# Altium PCB OBC_v8.PcbDoc (part 1 of 3)
Units mil, origin at the board's own origin, x right, y up, seen from the top; angles counter-clockwise.
Board outline 3550 x 3775 mil, 6 copper layers (Top Layer, MidLayer1, GND, Power, MidLayer2, Bottom Layer); 109 components, 228 nets, 761 pads, 521 vias.
Unrouted connection lines stored in the file: 4.
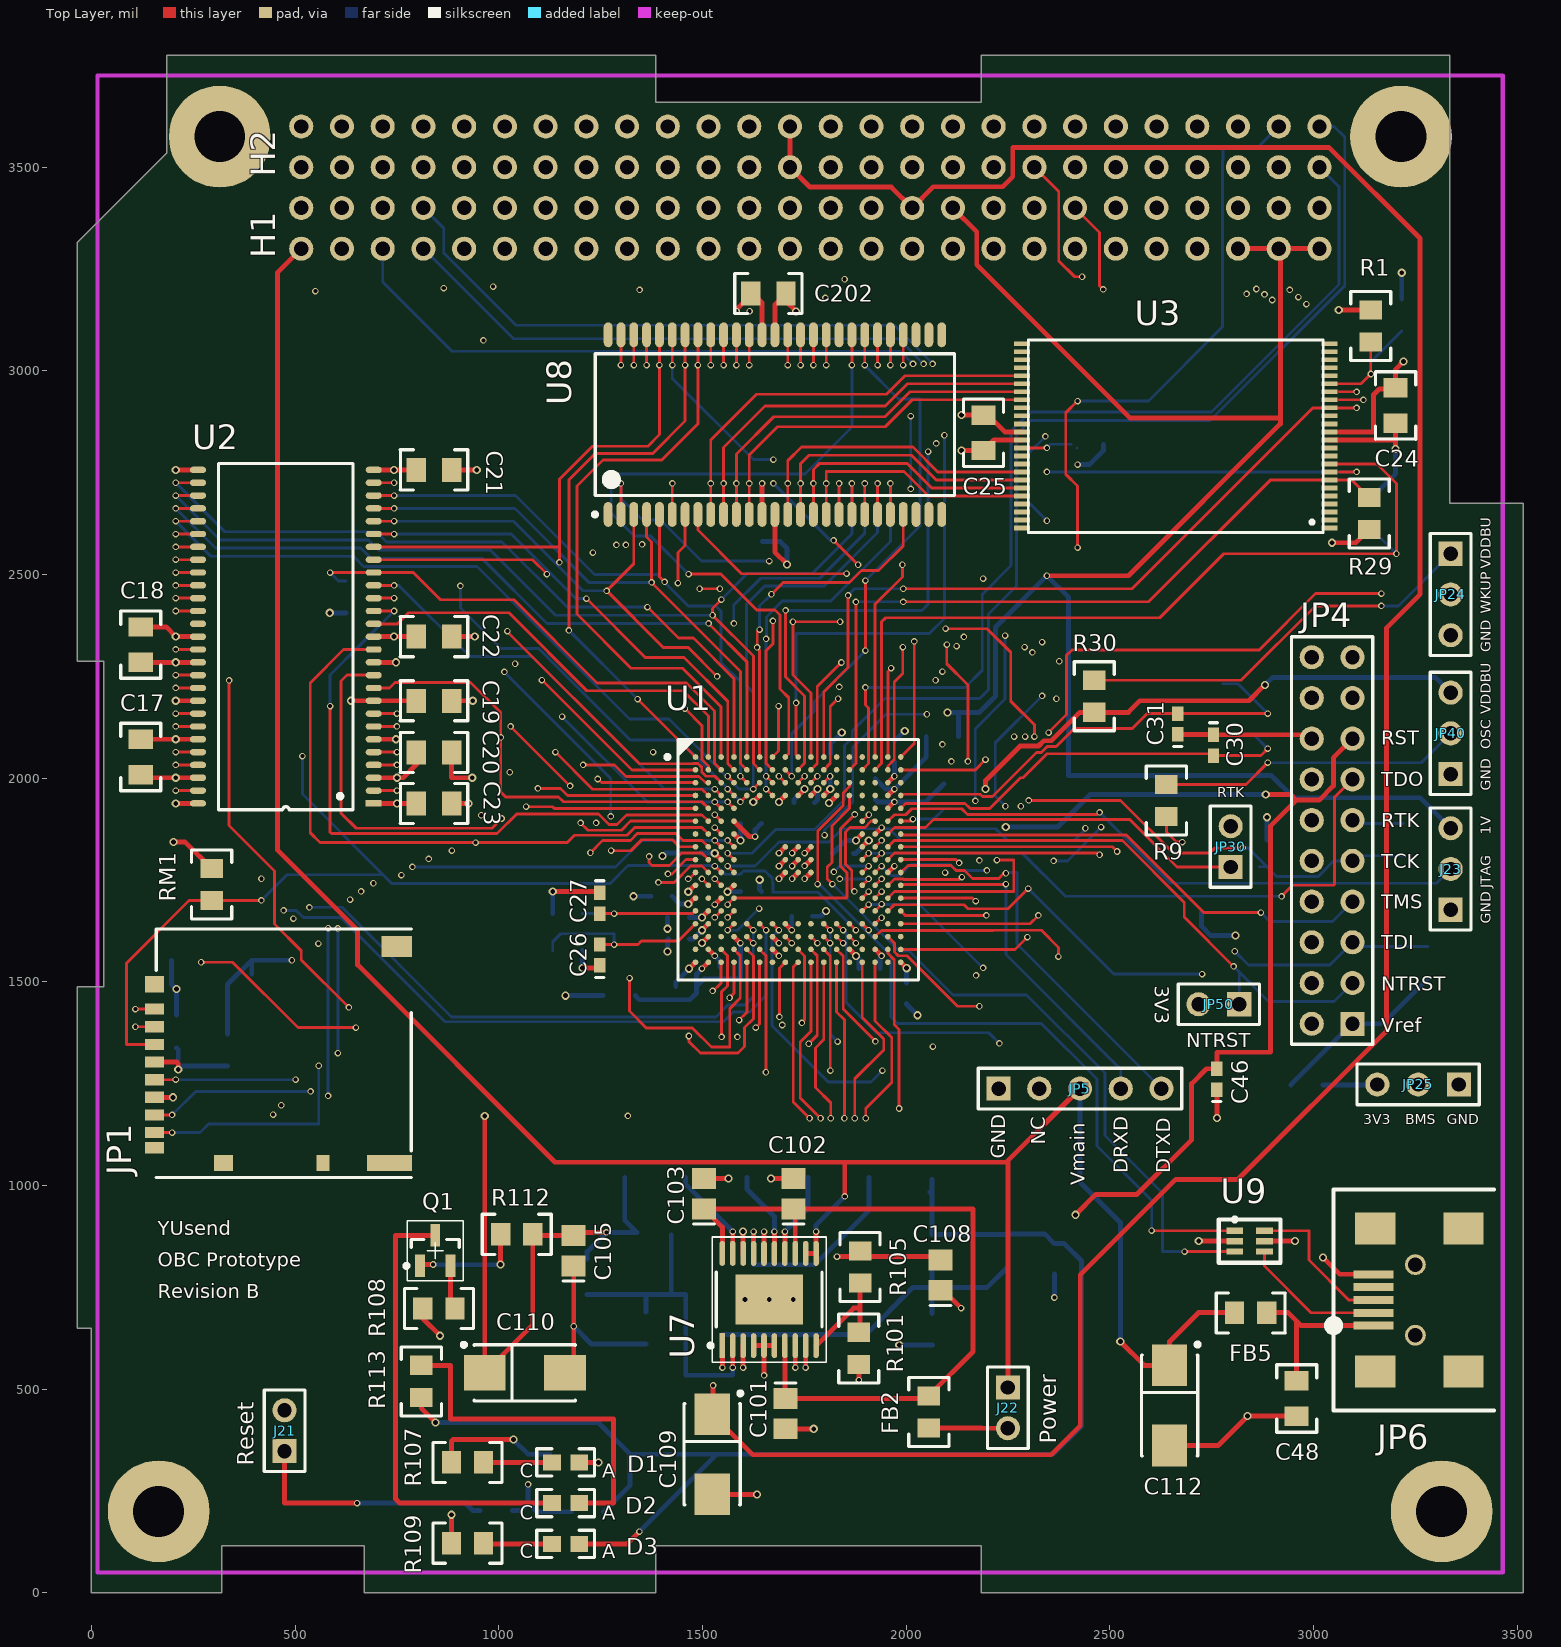
[diagram p0: Top Layer view]
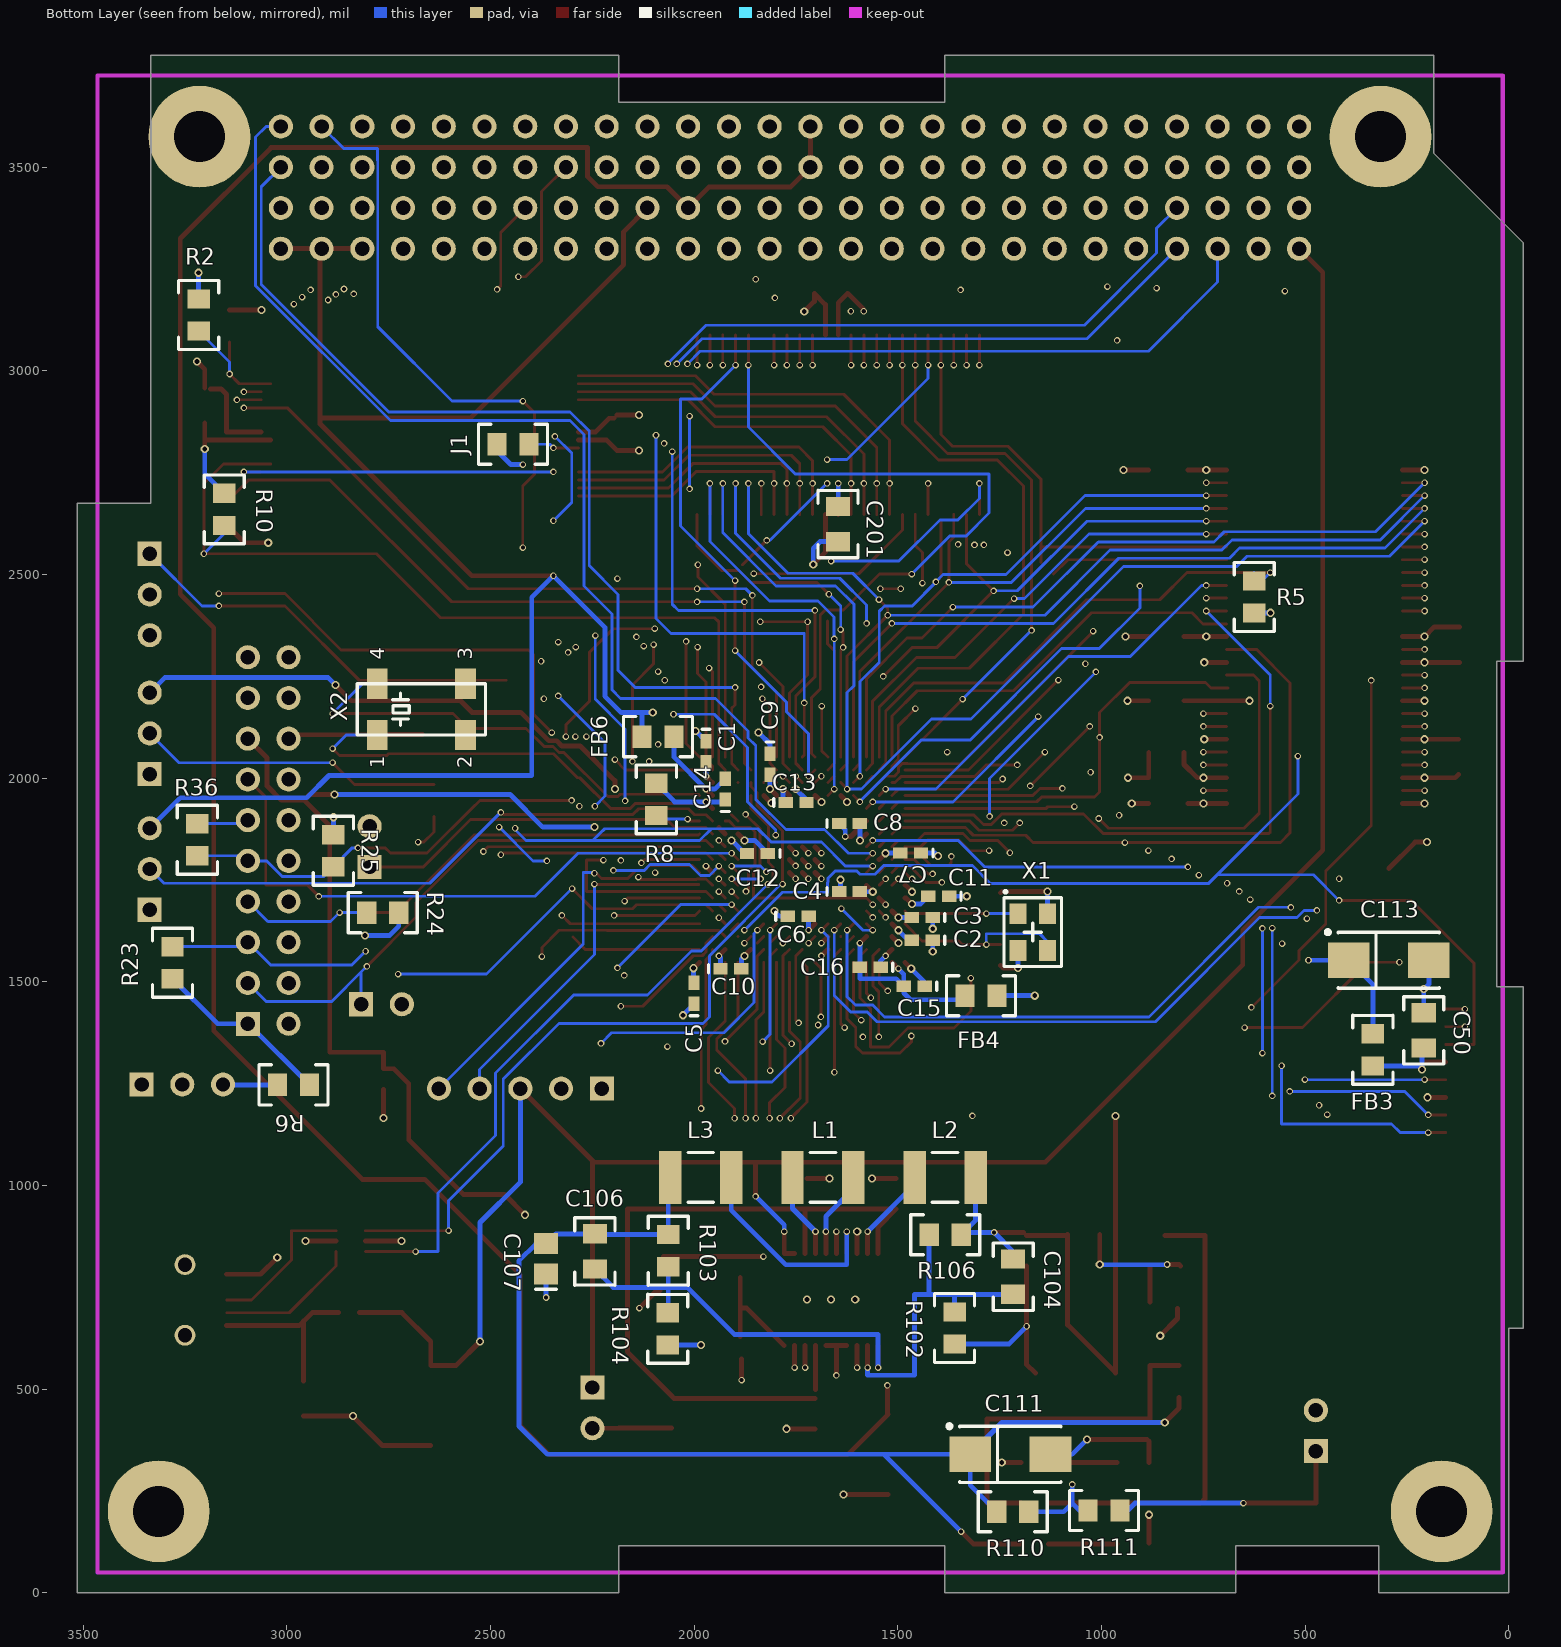
[diagram p1: Bottom Layer view, seen from below]
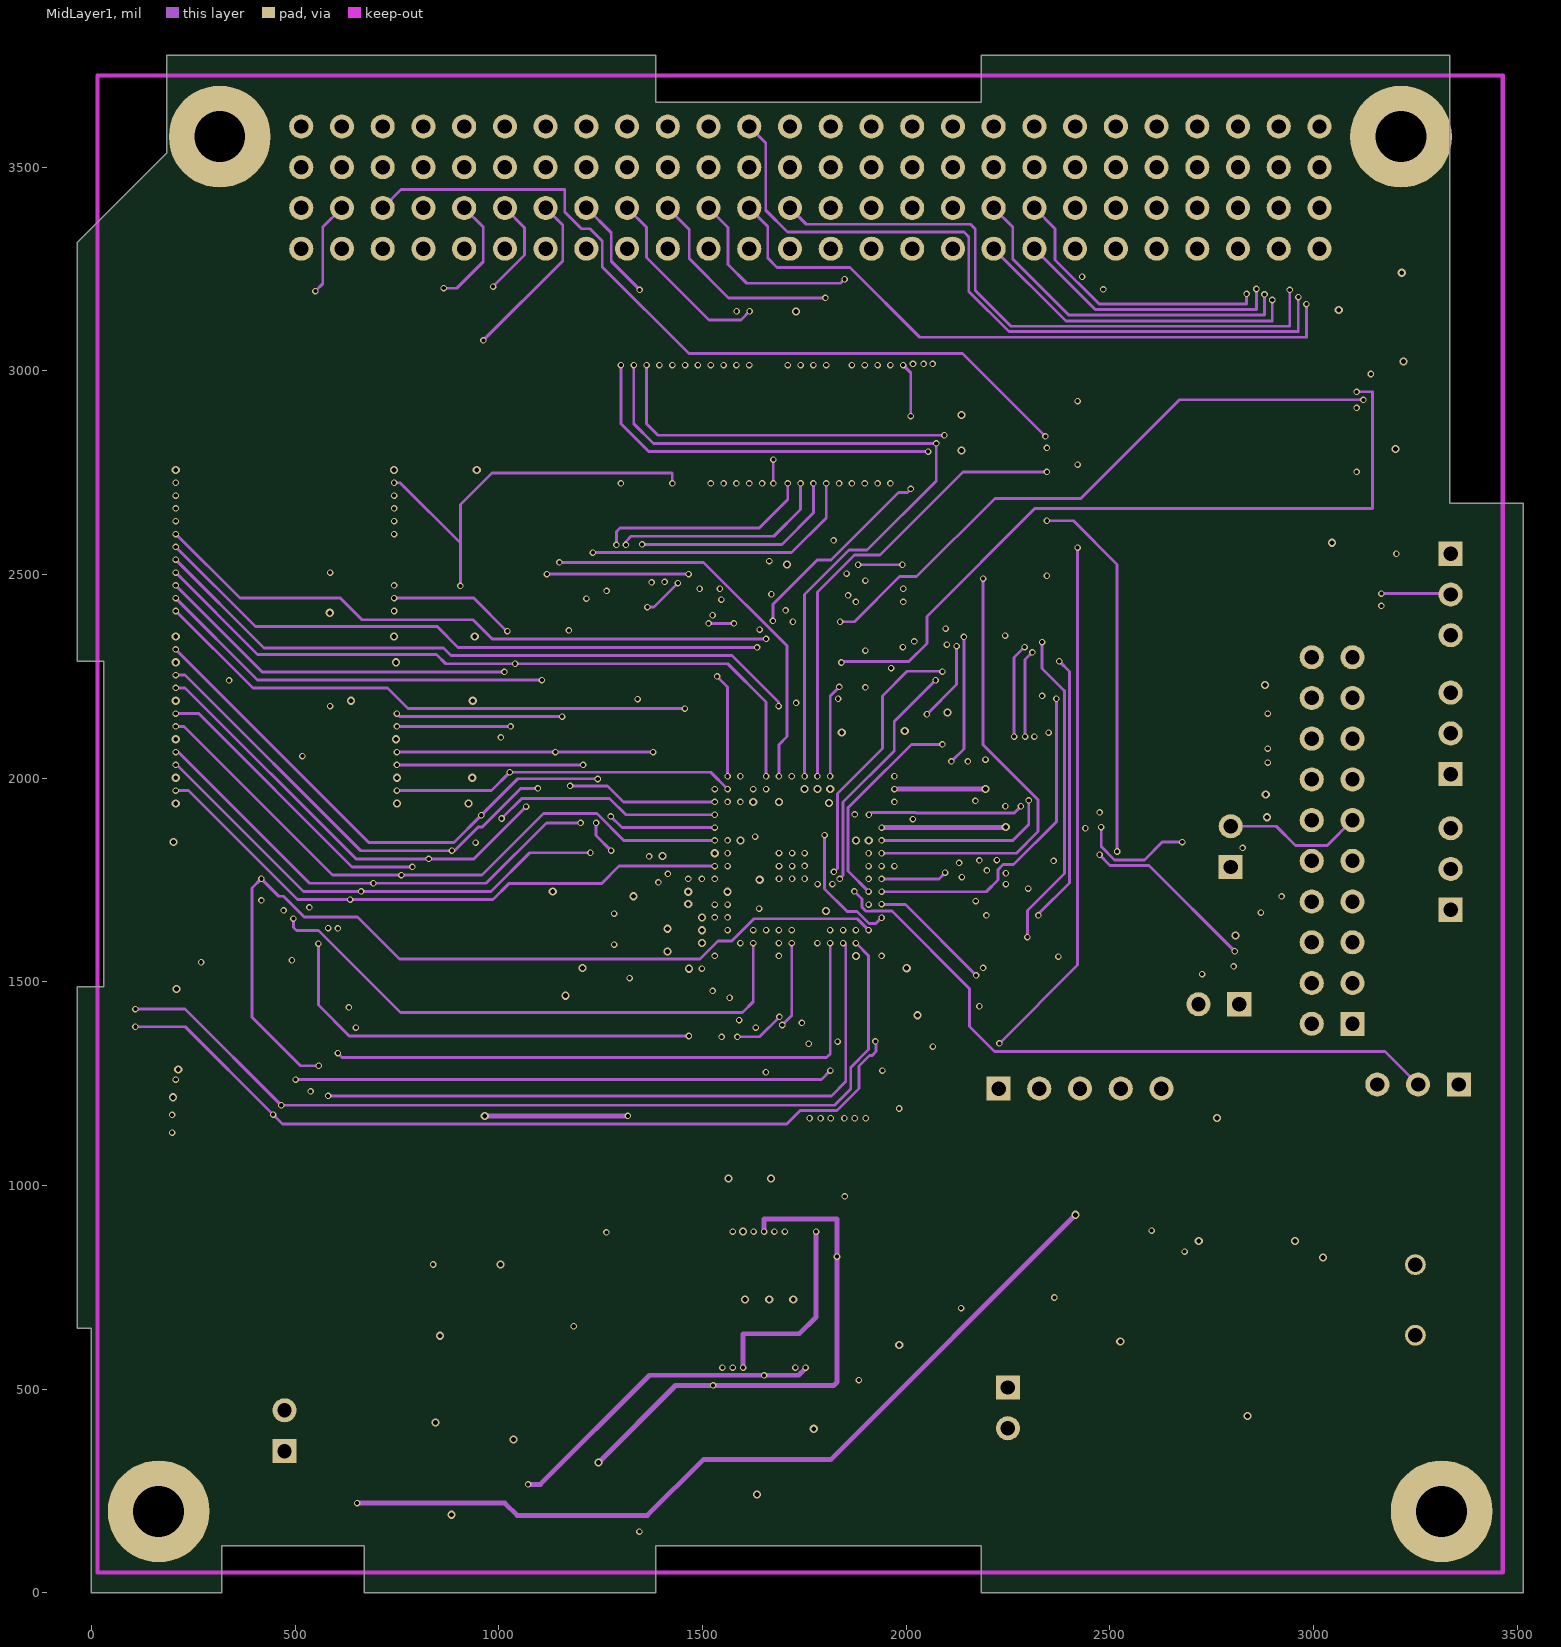
[diagram p2: MidLayer1]
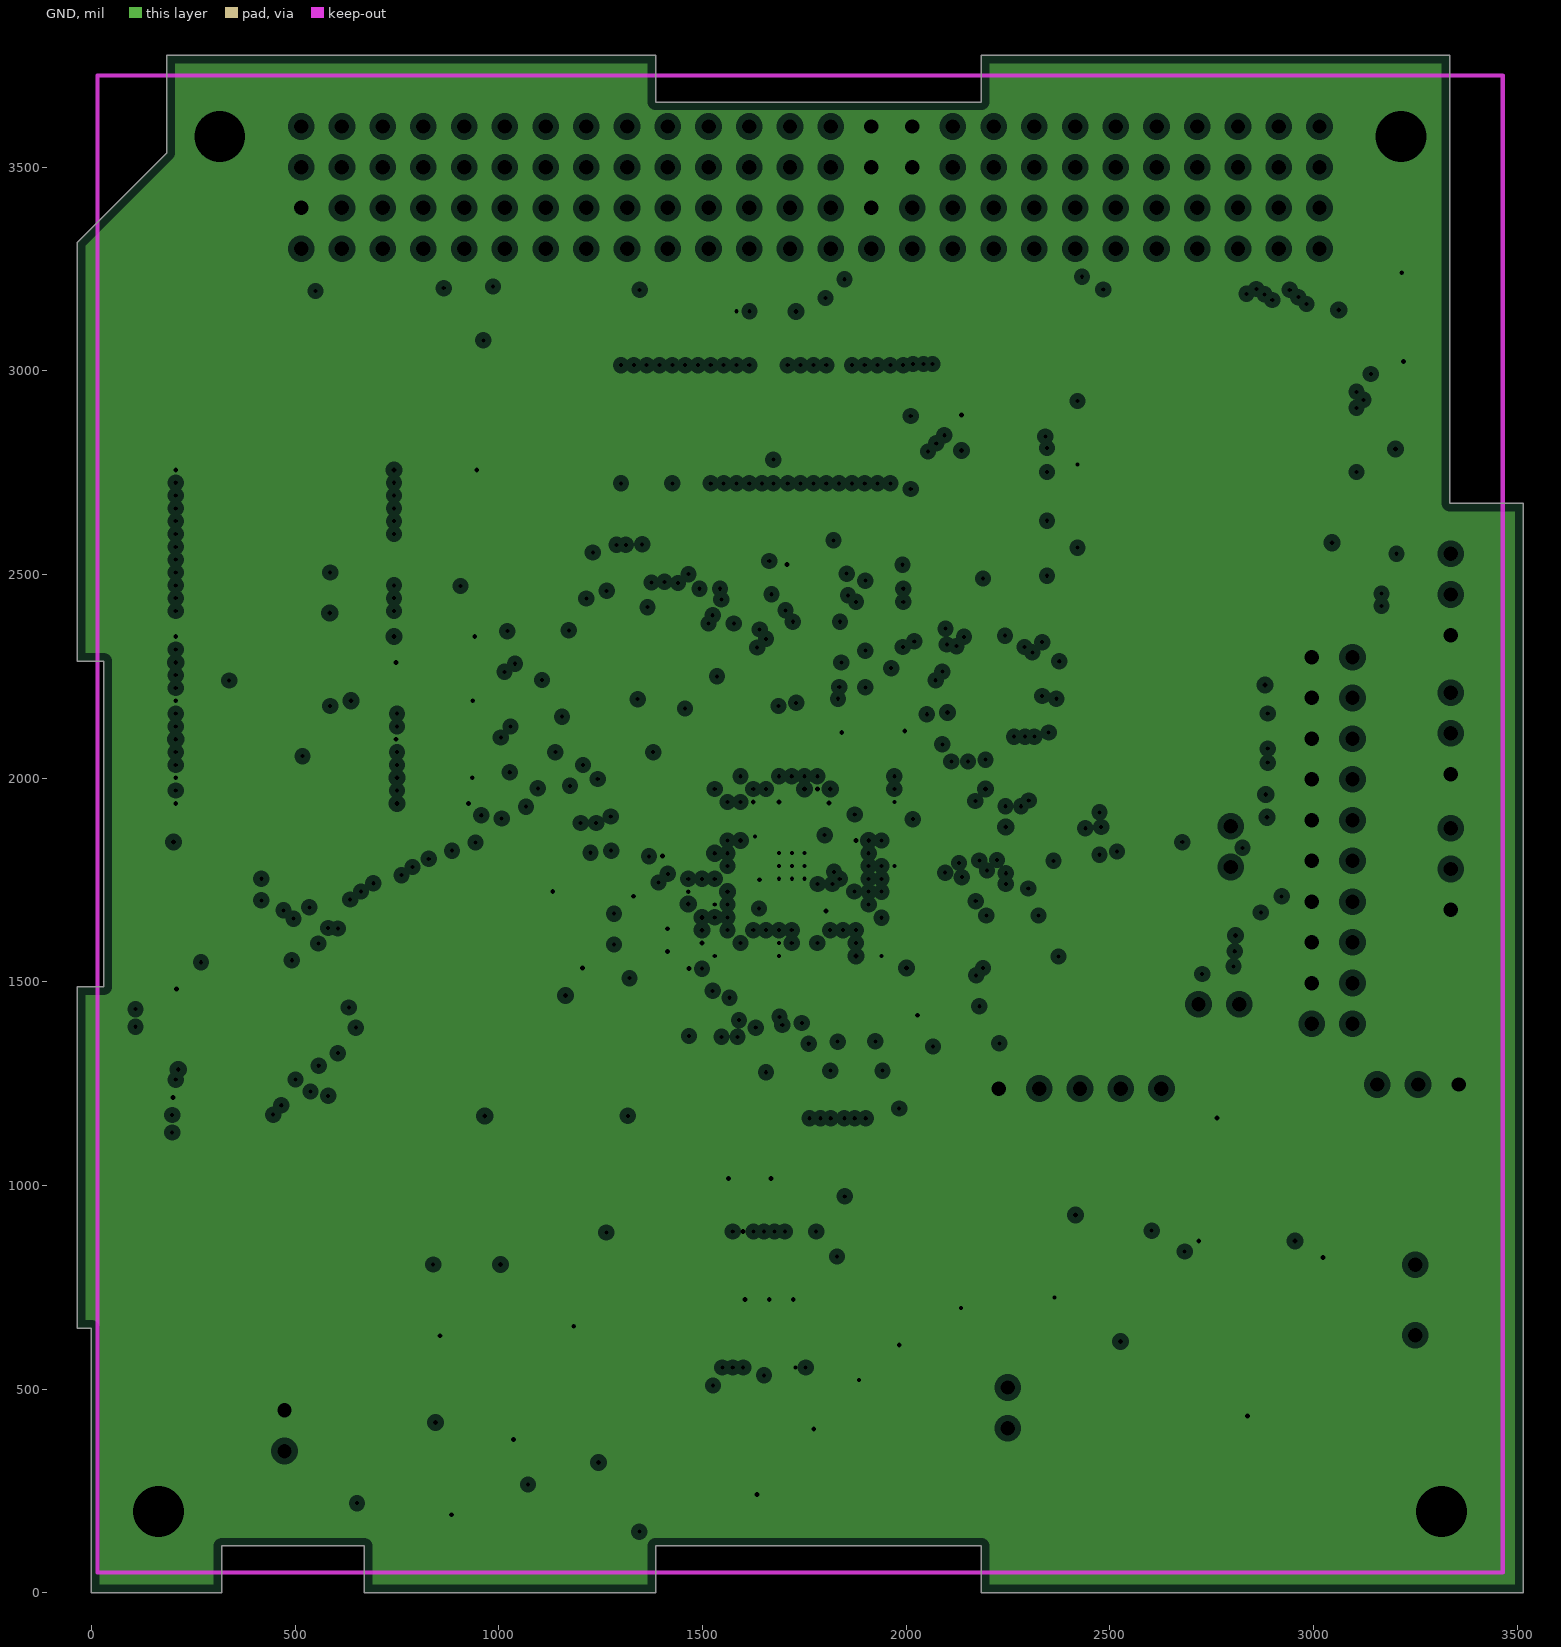
[diagram p3: GND, clearances drawn from the general rule]
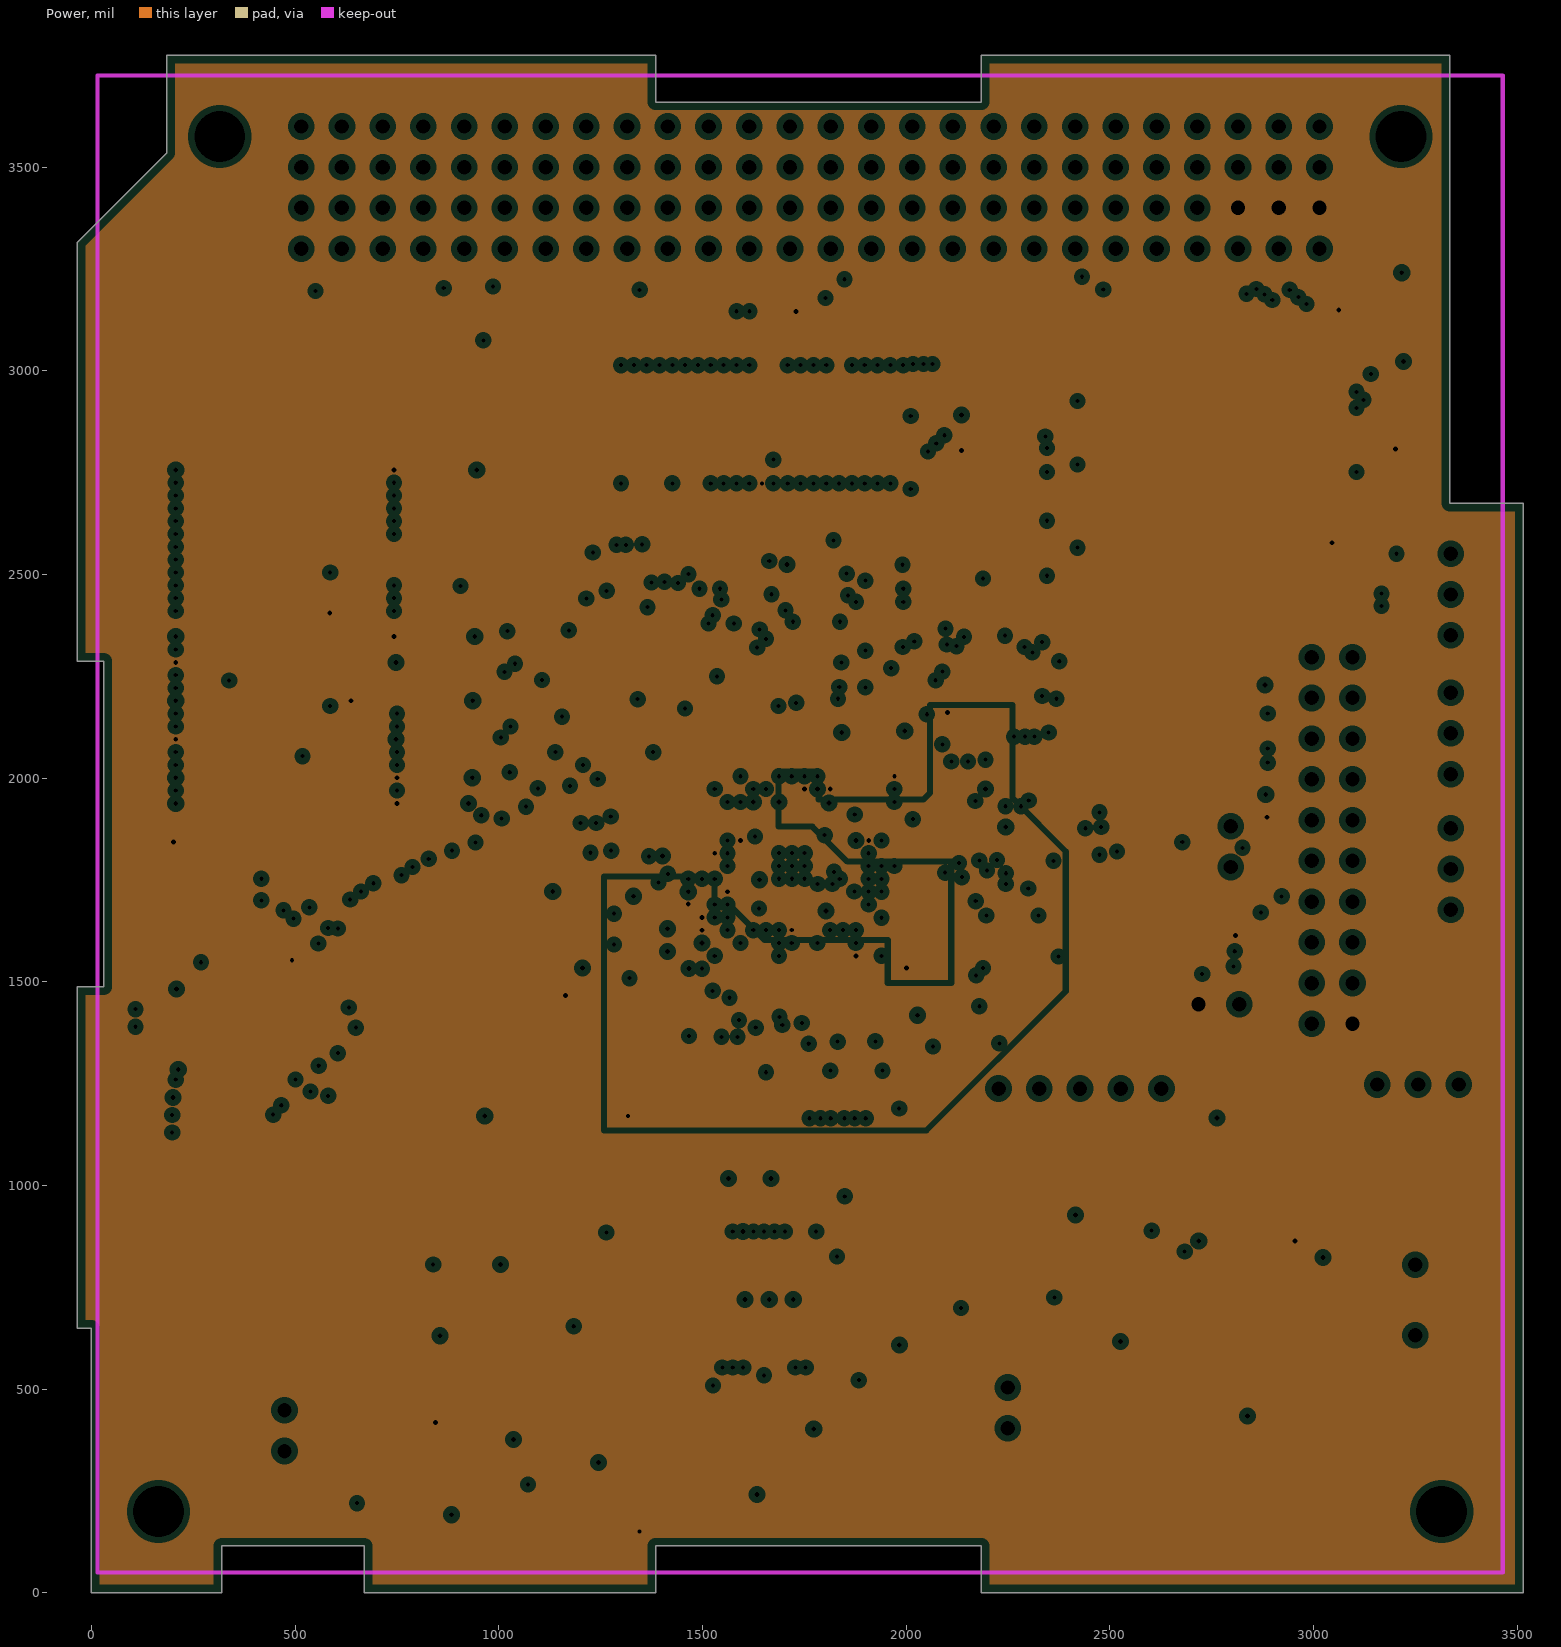
[diagram p4: Power, clearances drawn from the general rule]
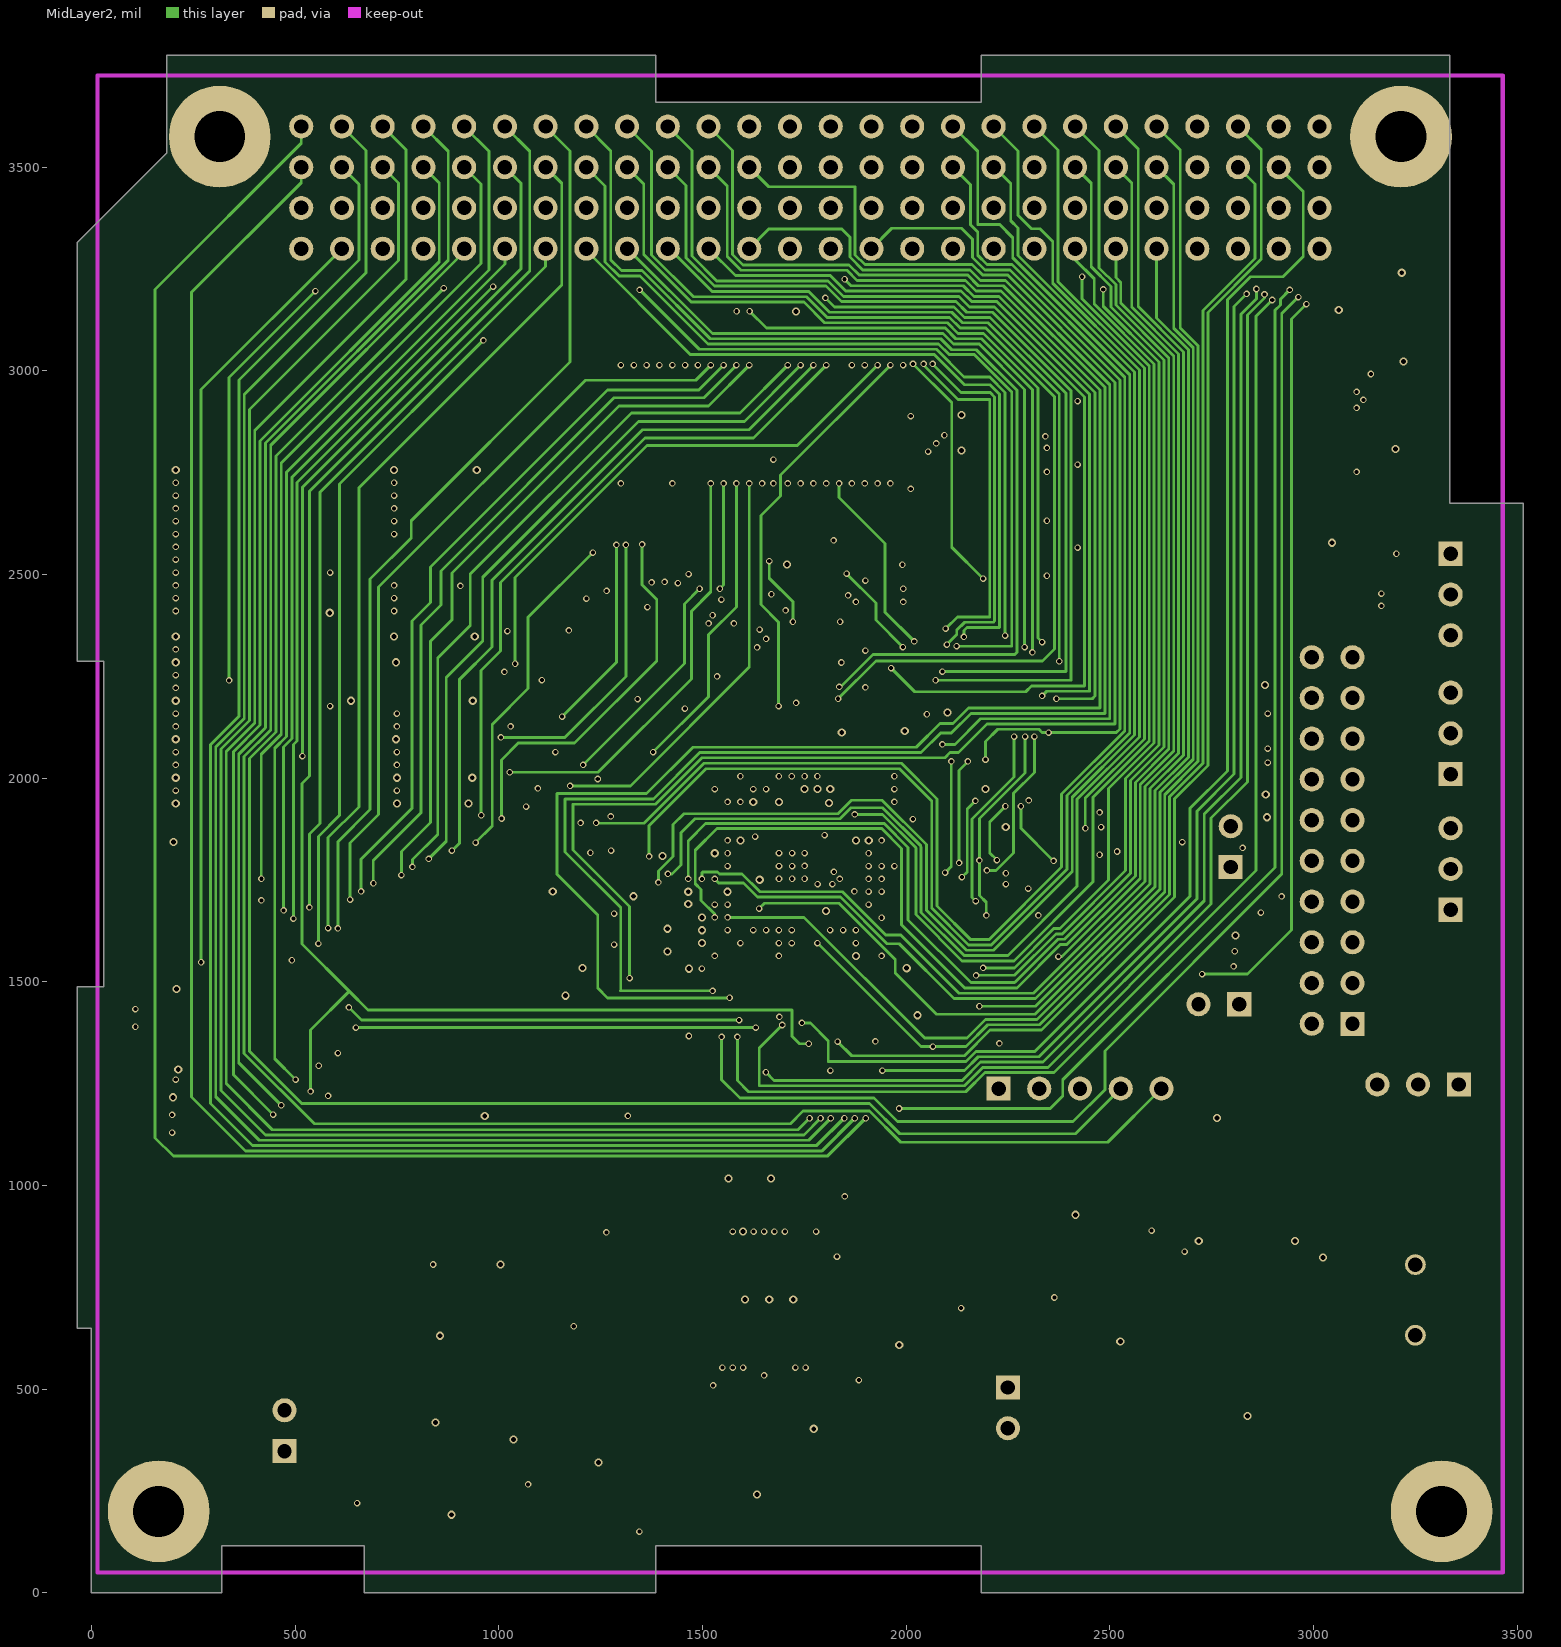
[diagram p5: MidLayer2]

## Layer stack, top to bottom
Top Solder: solder mask 0.4, Solder Resist, Dk 3.5
Top Layer: signal copper 1.4
Dielectric1: core 12.6, FR-4, Dk 4.8
MidLayer1: signal copper 1.4
Dielectric2: prepreg 12.6, FR-4, Dk 4.8
GND: plane copper 1.4, net AGND
Dielectric4: core 12.6, FR-4, Dk 4.8
Power: plane copper 1.4, net (Multiple Nets)
Dielectric5: prepreg 12.6, FR-4, Dk 4.8
MidLayer2: signal copper 1.4
Dielectric3: core 12.6, FR-4, Dk 4.8
Bottom Layer: signal copper 1.4
Bottom Solder: solder mask 0.4, Solder Resist, Dk 3.5

## Board outline
-35,650 0,650 0,0 320,0 320,115 670,115 670,0 1385,0 1385,115 2185,115 2185,0 3515,0 3515,2675 3335,2675 3335,3775 2185,3775 2185,3660 1385,3660 1385,3775 185,3775 185,3535 -35,3315 -35,2287.5 30,2287.5 30,1487.5 -35,1487.5

## Design rules (kind name [scope] priority, off if disabled: settings)
Clearance Clearance_1 [All] p1: gap=5
Clearance [All] p2: gap=8
HoleSize HoleSize_1 [All] p1: absolutevalues=TRUE maxlimit=125 minlimit=1 maxpercent=80.000 minpercent=20.000
HoleSize [All] p2: absolutevalues=TRUE maxlimit=100 minlimit=1 maxpercent=80.000 minpercent=20.000
MinimumSolderMaskSliver MinimumSolderMaskSliver_1 [All] p1: minsoldermaskwidth=4
MinimumSolderMaskSliver [All] p2: minsoldermaskwidth=10
PlaneClearance PlaneClearance_2 [IsPad] p1: clearance=20
PlaneClearance PlaneClearance_1 [All] p2: clearance=15
PlaneClearance [All] p3: clearance=20
PlaneConnect PlaneConnect_1 [All] p1: planeconnectstyle=Direct reliefexpansion=20 reliefentries=4 reliefconductorwidth=10 reliefairgap=10
PlaneConnect [All] p2: planeconnectstyle=Relief reliefexpansion=20 reliefentries=4 reliefconductorwidth=10 reliefairgap=10
PolygonConnect [All] p1: connectstyle=Relief reliefconductorwidth=10 reliefentries=4 polygonreliefangle="90 Angle" airgapwidth=10
RoutingLayers [All] p1: top layer_v5=TRUE mid layer 1_v5=FALSE mid layer 2_v5=FALSE bottom layer_v5=TRUE
RoutingVias RoutingVias_2 [InNet('AGND')] p1: holewidth=11 width=12 viastyle="Through Hole" minholewidth=9 minwidth=10 maxholewidth=25 maxwidth=26
RoutingVias RoutingVias_1 [All] p2: holewidth=10 width=16 viastyle="Through Hole" minholewidth=10 minwidth=16 maxholewidth=12 maxwidth=20
RoutingVias [All] p3: holewidth=25 width=40 viastyle="Through Hole" minholewidth=28 minwidth=50 maxholewidth=28 maxwidth=50
SilkToSolderMaskClearance SilkscreenOverComponentPads_1 [IsPad] p1: minsilkscreentomaskgap=0 clearancetoexposedcopper=TRUE
SilkToSolderMaskClearance SilkscreenOverComponentPads [IsPad] p2: minsilkscreentomaskgap=10 clearancetoexposedcopper=TRUE
SolderMaskExpansion [All] p1: expansion=4
Width Width_2 [InNetClass('Power')] p1: maxlimit=14 minlimit=12 preferedwidth=12 toplayer_maxwidth=12 midlayer1_maxwidth=12 bottomlayer_maxwidth=12 minimp=50.000000 maximp=50.000000 favimp=50.000000
Width Width_1 [All] p2: maxlimit=7 minlimit=7 preferedwidth=7 minimp=50.000000 maximp=50.000000 favimp=50.000000
Width [All] p3: maxlimit=8 minlimit=8 preferedwidth=8
23 further rules are at their usual default settings.

## Classes and differential pairs
component class SDRAM: C17 C18 C19 C20 C21 C22 C23 R5 U2
component class USB: C48 C112 FB5 JP6 U9
component class SDCARD: C50 C113 FB3 JP1 RM1
component class Power_Regulator: C101 C102 C103 C104 C105 C106 C107 C108 C109 C110 C111 D1 D2 D3 FB2 FB4 FB6 J21 J22 L1 L2 L3 Q1 R101 R102 R103 R104 R105 R106 R107 R108 R109 R110 R111 R112 R113 U7
component class MCU: C1 C2 C3 C4 C5 C6 C7 C8 C9 C10 C11 C12 C13 C14 C15 C16 C26 C27 C30 C31 C46 C58 C59 J23 JP2 JP4 JP5 JP24 JP25 JP30 JP40 JP50 R6 R7 R8 R9 R23 R24 R25 R30 R35 R36 U1 U6 X1 X2
net class A[0..22]: A0 A1 A2 A3 A4 A5 A6 A7 A8 A9 A10 A11 A12 A13 A14 A15 A16 A17 A18 A19 A20 A21 A22
net class D[0..15]: D0 D1 D2 D3 D4 D5 D6 D7 D8 D9 D10 D11 D12 D13 D14 D15
component class MRAM: C201 C202 U8
component class NAND: C24 C25 J1 R1 R2 R10 R29 U3
component class SAMTEC: H1 H2
net class Power: 1V 3V3 3V3_CTRL 5V AGND AVDD AVDD33 IO23 NetC34_2 NetC48_2 NetC50_2 NetC56_2 NetC57_2 NetC101_1 NetC104_1 NetC106_1 NetD1_2 NetD2_1 NetD2_2 NetD3_2 NetFB2_1 NetJP25_3 NetL1_1 NetL1_2 NetL2_1 NetL3_1 NetQ1_1 NetQ1_2 NetR101_2 NRST VBACKUP VBATT "VCC SYS" VDDBU

## Components (designator, comment, footprint, x,y, rotation, side; value= is the part's Value field where it differs from the comment)
C1 "C0402_c_0.1uF" 0402 1971.22,2065 r270 bottom
C2 "C0402_c_0.1uF" 0402 1440,1602 r0 bottom
C3 "C0402_c_0.1uF" 0402 1440,1658 r0 bottom
C4 "C0402_c_0.1uF" 0402 1619,1722 r180 bottom
C5 "C0402_c_0.1uF" 0402 2001,1472 r90 bottom
C6 "C0402_c_0.1uF" 0402 1745,1661 r180 bottom
C7 "C0402_c_0.1uF" 0402 1469,1816 r0 bottom
C8 "C0402_c_0.1uF" 0402 1619,1889 r180 bottom
C9 "C0402_c_0.1uF" 0402 1814,2034 r270 bottom
C10 "C0402_c_0.1uF" 0402 1910,1532 r180 bottom
C11 "C0402_c_0.1uF" 0402 1400,1710 r0 bottom
C12 "C0402_c_0.1uF" 0402 1845,1815 r0 bottom
C13 "C0402_c_0.1uF" 0402 1750,1940 r180 bottom
C14 "C0402_c_0.1uF" 0402 1924.18,1973.23 r90 bottom
C15 "C0402_c_0.1uF" 0402 1460,1489 r0 bottom
C16 "C0402_c_4.7uF" 0402 1568,1536 r0 bottom
C17 "Kemet_0805_a_0.1uF" CAPC2008X06N 121,2052 r90 top
C18 "Kemet_0805_a_0.1uF" CAPC2008X06N 121,2328 r270 top
C19 "Kemet_0805_a_0.1uF" CAPC2008X06N 841,2189.97 r180 top
C20 "Kemet_0805_a_0.1uF" CAPC2008X06N 841,2062.99 r180 top
C21 "Kemet_0805_a_0.1uF" CAPC2008X06N 841,2756.9 r180 top
C22 "Kemet_0805_a_0.1uF" CAPC2008X06N 841,2347.45 r180 top
C23 "Kemet_0805_a_0.1uF" CAPC2008X06N 841,1938 r180 top
C24 "Kemet_0805_a_0.1uF" CAPC2008X06N 3202,2915 r90 top
C25 "Kemet_0805_a_0.1uF" CAPC2008X06N 2190,2848 r270 top
C26 "C0402_a_18pF" 0402 1248,1566 r90 top
C27 "C0402_a_18pF" 0402 1248,1693 r270 top
C30 "C0402_a_12pF" 0402 2755,2081 r270 top
C31 "C0402_a_12pF" 0402 2667,2133 r90 top
C46 "C0402_c_0.1uF" 0402 2763,1261 r90 top
C48 "Kemet_0805_a_0.1uF" CAPC2008X06N 2959,477 r90 top
C50 "Kemet_0805_a_0.1uF" CAPC2008X06N 209,1381 r270 bottom
C101 "C0805_c_10uF" 0805#1 1704,440 r270 top
C102 "C0805_c_10uF" 0805#1 1724,980 r90 top
C103 "C0805_c_10uF" 0805#1 1504,980 r90 top
C104 "AVX_0805_a2_22pf" CAPC2008X06N 1217,776 r90 bottom
C105 "C0805_c_10uF" 0805#1 1184,840 r90 top
C106 "AVX_0805_a3_33pf" CAPC2008X06N 2244,837.98 r90 bottom
C107 "C0805_c_10uF" 0805#1 2364,820 r90 bottom
C108 "C0805_c_22uF" 0805#1 2084,780 r90 top
C109 "TantCap_6032_100uF" 6032 1524,340 r270 top
C110 "TantCap_6032_100uF" 6032 1064,540 r0 top
C111 "TantCap_6032_100uF" 6032 1224,340 r180 bottom
C112 "TantCap_6032_100uF" 6032 2647,460 r270 top
C113 "TantCap_6032_100uF" 6032 295,1553 r180 bottom
C201 "Kemet_0805_a_0.1uF" CAPC2008X06N 1647,2624 r270 bottom
C202 "Kemet_0805_a_0.1uF" CAPC2008X06N 1662,3190 r0 top
D1 "LED_Green" LED 1164,320 r180 top
D2 "LED_Green" LED 1164,220 r180 top
D3 "LED_Green" LED 1164,120 r180 top
FB2 "Murata_a_0805_30_Ohm_100Mhz" 0805#2 2056,444 r90 top
FB3 "Murata_a_0805_30_Ohm_100Mhz" 0805#2 334,1333 r90 bottom
FB4 "Murata_a_0805_30_Ohm_100Mhz" 0805#2 1296,1466 r0 bottom
FB5 "Murata_a_0805_30_Ohm_100Mhz" 0805#2 2846,687 r0 top
FB6 "Murata_a_0805_30_Ohm_100Mhz" 0805#2 2089,2102 r180 bottom
H1 "" SAMTEC_ESQ_126_39_G_D 515,3300 r90 top
H2 "" SAMTEC_ESQ_126_39_G_D 515,3500 r90 top
J1 "Susumu_0805_b1_1K" RES0805 2445,2819.85 r0 bottom
J21 "Header 2" HDR1X2 474,348 r90 top
J22 "Header 2" HDR1X2 2250,504 r270 top
J23 "Header 3" HDR1X3 3337,1677 r90 top
JP1 "MicroSD Connector" DM3AT-SF-PEJ 155,1433 r90 top
JP4 "Header 10X2" HDR2X10 3096,1397 r90 top
JP5 "Header 5" HDR1X5 2227,1238 r0 top
JP6 "Mini USB B" PCBComponent_1 3148,656 r180 top
JP24 "Header 3" HDR1X3 3337,2551 r270 top
JP25 "Header 3" HDR1X3 3357,1248 r180 top
JP30 "Header 2" HDR1X2 2797,1782 r90 top
JP40 "Header 3" HDR1X3 3337,2010 r90 top
JP50 "Header 2" HDR1X2 2818,1445 r180 top
L1 "L1812_4.7uH" L1812 1684,1020 r180 bottom
L2 "L1812_4.7uH" L1812 1384,1020 r180 bottom
L3 "L1812_4.7uH" L1812 1984,1020 r0 bottom
Q1 "NPN Transistor" SOT95P230X110-3N 844,840 r90 top
R1 "Susumu_0805_b3_470K" RES0805 3141,3110 r270 top
R2 "0805_NP" RES0805 3217,3137 r270 bottom
R5 "Susumu_0805_b3_470K" RES0805 625,2445 r90 bottom
R6 "Susumu_0805_b3_100K" RES0805 2984,1247 r0 bottom
R8 "Susumu_0805_b1_1K" RES0805 2093,1948 r270 bottom
R9 "Susumu_0805_b2_10K" RES0805 2639,1945 r270 top
R10 "Susumu_0805_b3_470K" RES0805 3154,2660 r270 bottom
R23 "Susumu_0805_b3_100K" RES0805 3281,1547 r270 bottom
R24 "Susumu_0805_b3_100K" RES0805 2765,1670 r180 bottom
R25 "Susumu_0805_b3_100K" RES0805 2886,1822 r90 bottom
R29 "Susumu_0805_b1_1K" RES0805 3137,2650 r90 top
R30 "Susumu_0805_b3_100K" RES0805 2462,2201 r270 top
R36 "0805_NP" RES0805 3220,1849 r270 bottom
R101 "Panasonic_0805_b_150K" RES0805 1884,600 r90 top
R102 "Susumu_0805_c_118K" RES0805 1361,650 r90 bottom
R103 "TE_0805_a_274K" RES0805 2064,840 r90 bottom
R104 "Susumu_0805_a_60.4K" RES0805 2065,648 r90 bottom
R105 "TE_0805_c_1.1K" RES0805 1887,800 r90 top
R106 "Susumu_0805_b_80.6K" RES0805 1384,879 r180 bottom
R107 "Susumu_0805_a3_200" RES0805 923,320 r0 top
R108 "Susumu_0805_a3_200" RES0805 853,698 r0 top
R109 "Susumu_0805_a3_200" RES0805 923,122 r0 top
R110 "Susumu_0805_c3_499K" RES0805 1218,199 r180 bottom
R111 "Susumu_0805_b2_10K" RES0805 994,202 r0 bottom
R112 "Susumu_0805_a3_200" RES0805 1044,880 r180 top
R113 "Susumu_0805_a3_200" RES0805 810,519 r270 top
RM1 "Susumu_0805_b2_10K" RES0805 295,1739 r90 top
U1 "AT91SAM9260" BGA217C80P17X17_1500X1500X140 1735,1800 r0 top
U2 "SDRAMx16" TSOP54 693,1938 r180 top
U3 "NAND Flash" "NAND Flash" 3040,2614 r180 top
U7 "LTC3521EFE#PBF" "LTC3521EFE#PBF - duplicate" 1664,720 r90 top
U8 "MRAM (Magnetoresistive RAM)" TSOP80P1180X120_HS-54N 1678,2868 r90 top
U9 "USBUF_SOT323-6" SOT65P210X110-6N 2807,889 r0 top
X1 "Crystal_18.432MHz" "Crystal Footprint" 1169,1622 r270 bottom
X2 "Crystal_32.768KHz" ECX-306 2670,2169 r90 bottom

## Footprints (in the part's own frame and the unit in brackets; to place one, negate y for a bottom-side part, rotate by r counter-clockwise, add the part's x,y. Pads: shape width x height; smd on the part's side, far side on the other; paste and mask are expansions set on the pad)
0402 [mm] "Chip Capacitor; Body 1.0 x 0.5 mm (LxW typ)"
  rect 0.9x0.7 smd: 1(-0.65,0) 2(0.65,0)
  silkscreen extent -1.4,-0.25 -1.4,0.25
0805#1 [mm] "Chip Capacitor; Body 2.0 x 1.2 mm (LxW typ)"
  rect 1.3x1.5 smd: 1(-0.95,0) 2(0.95,0)
  silkscreen extent -1.9,-0.65 -1.9,0.65
0805#2 [mm] "Footprint for SMD 0805"
  rect 1.2x1.4 smd: 1(-1,0) 2(1,0)
  silkscreen extent -2.15,-1.25 2.15,1.25
6032 [mm]
  rect 2.6x2.2 smd: 1(-2.5,0) 2(2.5,0)
  silkscreen extent -3.92,-1.75 3.15,1.88
BGA217C80P17X17_1500X1500X140 [mm] "BGA, 217-Leads, Body 15.0x15.0mm,  Pitch 0.80mm"
  round 0.35 smd: A1(-6.4,6.4) A2(-5.6,6.4) A3(-4.8,6.4) A4(-4,6.4) A5(-3.2,6.4) A6(-2.4,6.4) A7(-1.6,6.4) A8(-0.8,6.4) A9(0,6.4) A10(0.8,6.4) A11(1.6,6.4) A12(2.4,6.4) A13(3.2,6.4) A14(4,6.4) A15(4.8,6.4) A16(5.6,6.4) A17(6.4,6.4) B1(-6.4,5.6) B2(-5.6,5.6) B3(-4.8,5.6) B4(-4,5.6) B5(-3.2,5.6) B6(-2.4,5.6) B7(-1.6,5.6) B8(-0.8,5.6) B9(0,5.6) B10(0.8,5.6) B11(1.6,5.6) B12(2.4,5.6) B13(3.2,5.6) B14(4,5.6) B15(4.8,5.6) B16(5.6,5.6) B17(6.4,5.6) C1(-6.4,4.8) C2(-5.6,4.8) C3(-4.8,4.8) C4(-4,4.8) C5(-3.2,4.8) C6(-2.4,4.8) C7(-1.6,4.8) C8(-0.8,4.8) C9(0,4.8) C10(0.8,4.8) C11(1.6,4.8) C12(2.4,4.8) C13(3.2,4.8) C14(4,4.8) C15(4.8,4.8) C16(5.6,4.8) C17(6.4,4.8) D1(-6.4,4) D2(-5.6,4) D3(-4.8,4) D4(-4,4) D5(-3.2,4) D6(-2.4,4) D7(-1.6,4) D8(-0.8,4) D9(0,4) D10(0.8,4) D11(1.6,4) D12(2.4,4) D13(3.2,4) D14(4,4) D15(4.8,4) D16(5.6,4) D17(6.4,4) E1(-6.4,3.2) E2(-5.6,3.2) E3(-4.8,3.2) E4(-4,3.2) E14(4,3.2) E15(4.8,3.2) E16(5.6,3.2) E17(6.4,3.2) F1(-6.4,2.4) F2(-5.6,2.4) F3(-4.8,2.4) F4(-4,2.4) F14(4,2.4) F15(4.8,2.4) F16(5.6,2.4) F17(6.4,2.4) G1(-6.4,1.6) G2(-5.6,1.6) G3(-4.8,1.6) G4(-4,1.6) G14(4,1.6) G15(4.8,1.6) G16(5.6,1.6) G17(6.4,1.6) H1(-6.4,0.8) H2(-5.6,0.8) H3(-4.8,0.8) H4(-4,0.8) H8(-0.8,0.8) H9(0,0.8) H10(0.8,0.8) H14(4,0.8) H15(4.8,0.8) H16(5.6,0.8) H17(6.4,0.8) J1(-6.4,0) J2(-5.6,0) J3(-4.8,0) J4(-4,0) J8(-0.8,0) J9(0,0) J10(0.8,0) J14(4,0) J15(4.8,0) J16(5.6,0) J17(6.4,0) K1(-6.4,-0.8) K2(-5.6,-0.8) K3(-4.8,-0.8) K4(-4,-0.8) K8(-0.8,-0.8) K9(0,-0.8) K10(0.8,-0.8) K14(4,-0.8) K15(4.8,-0.8) K16(5.6,-0.8) K17(6.4,-0.8) L1(-6.4,-1.6) L2(-5.6,-1.6) L3(-4.8,-1.6) L4(-4,-1.6) L14(4,-1.6) L15(4.8,-1.6) L16(5.6,-1.6) L17(6.4,-1.6) M1(-6.4,-2.4) M2(-5.6,-2.4) M3(-4.8,-2.4) M4(-4,-2.4) M14(4,-2.4) M15(4.8,-2.4) M16(5.6,-2.4) M17(6.4,-2.4) N1(-6.4,-3.2) N2(-5.6,-3.2) N3(-4.8,-3.2) N4(-4,-3.2) N14(4,-3.2) N15(4.8,-3.2) N16(5.6,-3.2) N17(6.4,-3.2) P1(-6.4,-4) P2(-5.6,-4) P3(-4.8,-4) P4(-4,-4) P5(-3.2,-4) P6(-2.4,-4) P7(-1.6,-4) P8(-0.8,-4) P9(0,-4) P10(0.8,-4) P11(1.6,-4) P12(2.4,-4) P13(3.2,-4) P14(4,-4) P15(4.8,-4) P16(5.6,-4) P17(6.4,-4) R1(-6.4,-4.8) R2(-5.6,-4.8) R3(-4.8,-4.8) R4(-4,-4.8) R5(-3.2,-4.8) R6(-2.4,-4.8) R7(-1.6,-4.8) R8(-0.8,-4.8) R9(0,-4.8) R10(0.8,-4.8) R11(1.6,-4.8) R12(2.4,-4.8) R13(3.2,-4.8) R14(4,-4.8) R15(4.8,-4.8) R16(5.6,-4.8) R17(6.4,-4.8) T1(-6.4,-5.6) T2(-5.6,-5.6) T3(-4.8,-5.6) T4(-4,-5.6) T5(-3.2,-5.6) T6(-2.4,-5.6) T7(-1.6,-5.6) T8(-0.8,-5.6) T9(0,-5.6) T10(0.8,-5.6) T11(1.6,-5.6) T12(2.4,-5.6) T13(3.2,-5.6) T14(4,-5.6) T15(4.8,-5.6) T16(5.6,-5.6) T17(6.4,-5.6) U1(-6.4,-6.4) U2(-5.6,-6.4) U3(-4.8,-6.4) U4(-4,-6.4) U5(-3.2,-6.4) U6(-2.4,-6.4) U7(-1.6,-6.4) U8(-0.8,-6.4) U9(0,-6.4) U10(0.8,-6.4) U11(1.6,-6.4) U12(2.4,-6.4) U13(3.2,-6.4) U14(4,-6.4) U15(4.8,-6.4) U16(5.6,-6.4) U17(6.4,-6.4)
  silkscreen extent -8.27,-7.5 7.5,7.5
CAPC2008X06N [mm] "Chip Capacitor, 2-Leads, Body 2.0x0.8mm, IPC Medium Density"
  rect 1.2x1.5 smd: 1(-1.1,0) 2(1.1,0)
  silkscreen extent -2.1,-1.25 2.1,1.25
"Crystal Footprint" [mm] "Crystal Footprint for 3.2mm x 2.5mm"
  rect 1.3x1.05 smd: 1(-1.15,-0.925) 2(1.15,-0.925) 3(1.15,0.925) 4(-1.15,0.925)
  silkscreen extent -2.57,-1.8 2.15,1.8
DM3AT-SF-PEJ [mm] "CONN MICRO SD R/A PUSH-PUSH SMD"
  rect 0.7x1.2 smd: 1(0,0) 2(-1.1,0) 3(-2.2,0) 4(-3.3,0) 5(-4.4,0) 6(-5.5,0) 7(-6.6,0) 8(-7.7,0) C2(-8.65,0)
  rect 1x1.2 smd: C1(1.55,0) C3(-9.6,-4.3)
  rect 1x0.8 smd: C4(-9.6,-10.5)
  rect 1x2.8 smd: C5(-9.6,-14.65)
  rect 1.3x1.9 smd: C6(3.9,-15.1)
  silkscreen extent -10.5,-16 5,-0.1
ECX-306 [mm] "Crystal"
  rect 1.9x1.3 smd: 1(-1.6,2.75) 2(-1.6,-2.75) 3(1.6,-2.75) 4(1.6,2.75)
  silkscreen extent -1.6,-4 1.6,4
HDR1X2 [mm] "Connector; Header; 2 Position"
  rect 1.5x1.5 hole 0.9: 1(0,0)
  round 1.5 hole 0.9: 2(2.54,0)
  silkscreen extent -1.27,-1.27 3.81,1.27
HDR1X3 [mm] "Connector; Header; 3 Position"
  rect 1.5x1.5 hole 0.9: 1(0,0)
  round 1.5 hole 0.9: 2(2.54,0) 3(5.08,0)
  silkscreen extent -1.27,-1.27 6.35,1.27
HDR1X5 [mm] "Connector; Header; 5 Position"
  rect 1.5x1.5 hole 0.9: 1(0,0)
  round 1.5 hole 0.9: 2(2.54,0) 3(5.08,0) 4(7.62,0) 5(10.16,0)
  silkscreen extent -1.27,-1.27 11.43,1.27
HDR2X10 [mm] "Connector; Header; 10x2 Position"
  rect 1.5x1.5 hole 0.9: 1(0,0)
  round 1.5 hole 0.9: 2(0,2.54) 3(2.54,0) 4(2.54,2.54) 5(5.08,0) 6(5.08,2.54) 7(7.62,0) 8(7.62,2.54) 9(10.16,0) 10(10.16,2.54) 11(12.7,0) 12(12.7,2.54) 13(15.24,0) 14(15.24,2.54) 15(17.78,0) 16(17.78,2.54) 17(20.32,0) 18(20.32,2.54) 19(22.86,0) 20(22.86,2.54)
  silkscreen extent -1.27,-1.27 24.13,3.81
L1812 [mm] "Chip Inductor, 4.5x3.2mm"
  rect 1.4x3.3 smd: 1(-1.9,0) 2(1.9,0)
  silkscreen extent -0.8,-1.55 0.8,1.55
LED [mm] "LED SFM"
  rect 1.1x1 smd: 1(-0.85,0) 2(0.85,0)
  silkscreen extent -1.8,-0.85 1.8,0.85
"LTC3521EFE#PBF - duplicate" [mm] "TSOP, 20-Leads, Body 6.6x4.5mm (max), Pitch 0.65mm, IPC Medium Density"
  rect 1.55x0.35 smd: 1(-2.875,2.925)
  oval 1.55x0.35 smd: 2(-2.875,2.275) 3(-2.875,1.625) 4(-2.875,0.975) 5(-2.875,0.325) 6(-2.875,-0.325) 7(-2.875,-0.975) 8(-2.875,-1.625) 9(-2.875,-2.275) 10(-2.875,-2.925) 11(2.875,-2.925) 12(2.875,-2.275) 13(2.875,-1.625) 14(2.875,-0.975) 15(2.875,-0.325) 16(2.875,0.325) 17(2.875,0.975) 18(2.875,1.625) 19(2.875,2.275) 20(2.875,2.925)
  rect 3.1x4.2 smd: 21(0,0)
  silkscreen extent -3.9,-3.55 3.9,3.77
"NAND Flash" [mm] "NAND Flash TSOP48 parallel interface"
  rect 1x0.3 smd: 1(0,0) 2(0,-0.5) 3(0,-1) 4(0,-1.5) 5(0,-2) 6(0,-2.5) 7(0,-3) 8(0,-3.5) 9(0,-4) 10(0,-4.5) 11(0,-5) 12(0,-5.5) 13(0,-6) 14(0,-6.5) 15(0,-7) 16(0,-7.5) 17(0,-8) 18(0,-8.5) 19(0,-9) 20(0,-9.5) 21(0,-10) 22(0,-10.5) 23(0,-11) 24(0,-11.5) 25(19.2,-11.5) 26(19.2,-11) 27(19.2,-10.5) 28(19.2,-10) 29(19.2,-9.5) 30(19.2,-9) 31(19.2,-8.5) 32(19.2,-8) 33(19.2,-7.5) 34(19.2,-7) 35(19.2,-6.5) 36(19.2,-6) 37(19.2,-5.5) 38(19.2,-5) 39(19.2,-4.5) 40(19.2,-4) 41(19.2,-3.5) 42(19.2,-3) 43(19.2,-2.5) 44(19.2,-2) 45(19.2,-1.5) 46(19.2,-1) 47(19.2,-0.5) 48(19.2,0)
  silkscreen extent 0.4,-11.72 18.8,0.28
PCBComponent_1 [mm]
  rect 2.5x0.5 smd: 1(0,0) 2(0,-0.8) 3(0,-1.6) 4(0,-2.4) 5(0,-3.2)
  rect 2.5x2 smd: ""(-5.6,2.85) ""(-5.6,-6.05) ""(-0.1,2.85) ""(-0.1,-6.05)
  round 1.3 hole 0.9: ""(-2.6,0.6) ""(-2.6,-3.8)
  silkscreen extent -7.5,-8.5 2.8,5.3
RES0805 [mm] "Chip Resistor, 2-Leads, Body 2.0x1.3mm, IPC Medium Density"
  rect 1.2x1.4 smd: 1(-1,0) 2(1,0)
  silkscreen extent -2.15,-1.25 2.15,1.25
SAMTEC_ESQ_126_39_G_D [mm]
  round 1.5 hole 0.9: 1(0,0) 2(2.54,0) 3(0,-2.54) 4(2.54,-2.54) 5(0,-5.08) 6(2.54,-5.08) 7(0,-7.62) 8(2.54,-7.62) 9(0,-10.16) 10(2.54,-10.16) 11(0,-12.7) 12(2.54,-12.7) 13(0,-15.24) 14(2.54,-15.24) 15(0,-17.78) 16(2.54,-17.78) 17(0,-20.32) 18(2.54,-20.32) 19(0,-22.86) 20(2.54,-22.86) 21(0,-25.4) 22(2.54,-25.4) 23(0,-27.94) 24(2.54,-27.94) 25(0,-30.48) 26(2.54,-30.48) 27(0,-33.02) 28(2.54,-33.02) 29(0,-35.56) 30(2.54,-35.56) 31(0,-38.1) 32(2.54,-38.1) 33(0,-40.64) 34(2.54,-40.64) 35(0,-43.18) 36(2.54,-43.18) 37(0,-45.72) 38(2.54,-45.72) 39(0,-48.26) 40(2.54,-48.26) 41(0,-50.8) 42(2.54,-50.8) 43(0,-53.34) 44(2.54,-53.34) 45(0,-55.88) 46(2.54,-55.88) 47(0,-58.42) 48(2.54,-58.42) 49(0,-60.96) 50(2.54,-60.96) 51(0,-63.5) 52(2.54,-63.5)
  body extent -1.27,-65.02 3.81,1.52, height 11.05
SOT65P210X110-6N [mm] "SOT23, 6-Leads, Body 2.2x2.4mm (max), Pitch 0.65mm, IPC Medium Density"
  rect 1.05x0.4 smd: 3V3(1.85,-0.65) D1(0,0) D2(0,-1.3) D3(1.85,-1.3) D4(1.85,0) GND(0,-0.65)
  silkscreen extent -1,-2 2.85,0.8
SOT95P230X110-3N [mm] "SOT23, 3-Leads, Body 3.0x2.5mm (max), Pitch 0.95mm, IPC Medium Density"
  rect 1.4x0.6 smd: 1(-0.95,0.95) 2(-0.95,-0.95) 3(0.95,0)
  silkscreen extent -1.88,-1.75 1.88,1.92
TSOP54 [mm]
  rect 1x0.4 smd: 1(0,0)
  oval 1x0.4 smd: 2(0,-0.8) 3(0,-1.6) 4(0,-2.4) 5(0,-3.2) 6(0,-4) 7(0,-4.8) 8(0,-5.6) 9(0,-6.4) 10(0,-7.2) 11(0,-8) 12(0,-8.8) 13(0,-9.6) 14(0,-10.4) 15(0,-11.2) 16(0,-12) 17(0,-12.8) 18(0,-13.6) 19(0,-14.4) 20(0,-15.2) 21(0,-16) 22(0,-16.8) 23(0,-17.6) 24(0,-18.4) 25(0,-19.2) 26(0,-20) 27(0,-20.8) 28(10.96,-20.8) 29(10.96,-20) 30(10.96,-19.2) 31(10.96,-18.4) 32(10.96,-17.6) 33(10.96,-16.8) 34(10.96,-16) 35(10.96,-15.2) 36(10.96,-14.4) 37(10.96,-13.6) 38(10.96,-12.8) 39(10.96,-12) 40(10.96,-11.2) 41(10.96,-10.4) 42(10.96,-9.6) 43(10.96,-8.8) 44(10.96,-8) 45(10.96,-7.2) 46(10.96,-6.4) 47(10.96,-5.6) 48(10.96,-4.8) 49(10.96,-4) 50(10.96,-3.2) 51(10.96,-2.4) 52(10.96,-1.6) 53(10.96,-0.8) 54(10.96,0)
  silkscreen extent 1.28,-21.2 9.68,0.4
TSOP80P1180X120_HS-54N [mm] "TSOP, 54-Leads, Body 22.4x10.3mm (max), Pitch 0.80mm, IPC Medium Density"
  oval 1.55x0.55 smd: 1(-5.6,10.4) 2(-5.6,9.6) 3(-5.6,8.8) 4(-5.6,8) 5(-5.6,7.2) 6(-5.6,6.4) 7(-5.6,5.6) 8(-5.6,4.8) 9(-5.6,4) 10(-5.6,3.2) 11(-5.6,2.4) 12(-5.6,1.6) 13(-5.6,0.8) 14(-5.6,0) 15(-5.6,-0.8) 16(-5.6,-1.6) 17(-5.6,-2.4) 18(-5.6,-3.2) 19(-5.6,-4) 20(-5.6,-4.8) 21(-5.6,-5.6) 22(-5.6,-6.4) 23(-5.6,-7.2) 24(-5.6,-8) 25(-5.6,-8.8) 26(-5.6,-9.6) 27(-5.6,-10.4) 28(5.6,-10.4) 29(5.6,-9.6) 30(5.6,-8.8) 31(5.6,-8) 32(5.6,-7.2) 33(5.6,-6.4) 34(5.6,-5.6) 35(5.6,-4.8) 36(5.6,-4) 37(5.6,-3.2) 38(5.6,-2.4) 39(5.6,-1.6) 40(5.6,-0.8) 41(5.6,0) 42(5.6,0.8) 43(5.6,1.6) 44(5.6,2.4) 45(5.6,3.2) 46(5.6,4) 47(5.6,4.8) 48(5.6,5.6) 49(5.6,6.4) 50(5.6,7.2) 51(5.6,8) 52(5.6,8.8) 53(5.6,9.6) 54(5.6,10.4)
  silkscreen extent -5.72,-11.2 4.43,11.35

## Part data
C1 C2 C3 C4 C5 C6 C7 C8 C9 C10 C11 C12 C13 C14 C15 C46: "Ceramic Chip Capacitor - 0.1uF"
C16: "Ceramic Chip Capacitor - 4.7uF"
C17 C18 C19 C20 C21 C22 C23 C24 C25 C48 C50 C201 C202: "CAP CER 0.1UF 50V 10% X7R 0805"
C26 C27: "Ceramic Chip Capacitor - 18pF"
C30 C31: "Ceramic Chip Capacitor - 12pF"
C101 C102 C103 C105 C107: "Ceramic Chip Capacitor - 10uF"
C104: "CAP CER 22PF 50V 5% NP0 0805"
C106: "CAP CER 33PF 50V 5% NP0 0805"
C108: "Ceramic Chip Capacitor - 22uF"
C109 C110 C111 C112 C113: "CAP TANT 100UF 10V 10% LOESR SMD"
D1 D2 D3: "LED GREEN HI BRT SS TYPE LO CUR"
FB2 FB3 FB4 FB5 FB6: "FERRITE CHIP 30 OHM 3000MA 0805"
H1 H2: library part SAMTEC_ESQ_126_39_G_D, "26X2 header"
J1 R8 R29: "RES 1.0K OHM 1/10W .5% 0805 SMD"
J21 J22 JP30 JP50: "Header, 2-Pin"
J23 JP24 JP25 JP40: "Header, 3-Pin"
JP1: "CONN MICRO SD R/A PUSH-PUSH SMD"
JP4: "Header, 10-Pin, Dual row"
JP5: "Header, 5-Pin"
JP6: "Mini B USB Receptacle Type B"
L1 L2 L3: "Inductor unshielded 4.7mH 1812 SMD"
Q1: "NPN Transistor, SMD"
R1 R5 R10: "RES 470K OHM 1/10W .5% 0805 SMD"
R2 R36: "No populate"
R6 R23 R24 R25 R30: "RES 100K OHM 1/10W .5% 0805 SMD"
R9 R111 RM1: "RES 10.0K OHM 1/10W .5% 0805 SMD"
R101: "RES 150K OHM 1/8W .1% 0805 SMD"
R102: "RES 118K OHM 1/10W .5% 0805 SMD"
R103: "RES 274K OHM 1/10W 0.1% 0805"
R104: "RES 60.4K OHM 1/10W .5% 0805 SMD"
R105: "RES 1.1M OHM 1/16W 0.1% 0805"
R106: "RES 80.6K OHM 1/10W .5% 0805 SMD"
R107 R108 R109 R112 R113: "RES 200 OHM 1/10W .5% 0805 SMD"
R110: "RES 499K OHM 1/10W .5% 0805 SMD"
U1: "ARM926EJ-S 32 bit RISC CPU, 217-Ball BGA"
U2: "SDRAM 54 TSOP II x16 architecture"
U3: "NAND Flash TSOP48"
U7: "IC BUCK BOOST SYNC ADJ 20TSSOP"
U8: library part MR4A16BCYS35, "IC MRAM 16MBIT 35NS 54TSOP"
U9: "EMI FIlter and Line Termination for USB Upstream Ports"
X1: "Crystal 18.432MHz 18PF SMD"
X2: "Crystal 32.768KHz 12.5PF SMD"

## Free pads (board coordinates)
  round 250 hole 125: 1(165,200) 2(3315,200) 3(315,3575) 4(3215,3575)

## Via types
v1: diameter 16, hole 10, Top Layer to Bottom Layer, 405 vias
v2: diameter 20, hole 12, Top Layer to Bottom Layer, 94 vias
v3: diameter 16, hole 10, Top Layer to MidLayer1, 22 vias

## Nets (pads, with @x,y where several pads share a name; then routed paths per layer and width w, separated by ;. In a path a pad name is that pad's centre, name@x,y a point inside that pad or via, vN(x,y) a via of type N, cw(c..) or ccw(c..) an arc to the next point about the centre after c; other vN are vias at no path point)
1V: C2.2 C3.2 C10.2 C11.2 C12.2 C13.2 C104.2 C105.2 C110.1 FB6.1 H1.34 H1.47 H1.49 H1.51 J23.3 L2.2 R106.2 R112.1 U1.D9 U1.H14 U1.M1 U1.N2 U1.P2 U1.T13 | length 6707.6
  Top Layer w12: v2(965.57,1171) C110.1@965.57,540 1083.37,657.8 R112.1@1083.37,877.4 ; R112.1@1083.37,880 R112.1@1083.37,877.4 ; C105.2@1184,877.4 R112.1@1083.37,877.4 ; C105.2@1191.19,884.59 v1(1264,884.59) ; v2(1465.28,1690.76) 1480.03,1705.51 U1.M1@1483.03,1705.51 ; v2@1467.28,1690.76 v2@1468.28,1690.76 ; v2(1498.78,1626.77) U1.P2@1514.53,1642.52 ; v2(1498.78,1658.27) U1.N2@1514.53,1674.02 ; U1.D9@1735,1957.48 v2(1750.75,1973.23) ; U1.T13@1860.98,1579.53 v2(1876.73,1563.78) ; U1.H14@1892.48,1831.5 v2(1908.23,1847.24) ; H1.34@2115,3400 2173.47,3341.53 2173.47,3260.47 2549.94,2884 2919,2884 ; v1(2345.85,2497) 2546,2497 2919,2870 2919,2884 ; H1.47@2815,3300 H1.49@2915,3300 ; H1.51@3015,3300 H1.49@2915,3300 ; H1.49@2915,3300 2919,3296 2919,2884
  MidLayer1 w12: v2(965.57,1171) v1(1317,1171)
  Bottom Layer w12: C104.2@1217,819.31 1217,837.59 v1(1264,884.59) 1339.04,884.59 1309.2,914.43 L2.2@1309.2,1020 ; C11.2@1425.59,1710 1444.83,1690.76 v2(1465.28,1690.76) ; C2.2@1467.59,1605 1477.01,1605 v2(1498.78,1626.77) ; C3.2@1467.59,1658 1467.86,1658.27 v2(1498.78,1658.27) ; C13.2@1724.41,1940 1724.41,1946.89 v2(1750.75,1973.23) ; C12.2@1870.59,1815 1875.98,1815 v2(1908.23,1847.24) ; v2(1876.73,1563.78) 1884.41,1556.1 C10.2@1884.41,1532 ; v2(2102,2161) 2128,2161 ; FB6.1@2128.37,2102 2128.37,2160.63 2128,2161 ; J23.3@3337,1877 3262,1952 2951.47,1952 2896.88,2006.59 2399,2006.59 2399,2443.85 v1(2345.85,2497) 2219.5,2370.65 2219.5,2201.5 2179,2161 2128,2161
3V3: C1.2 C4.2 C5.2 C6.2 C7.2 C8.2 C9.2 C17.2 C18.2 C19.2 C20.2 C21.2 C22.2 C23.2 C24.1 C25.2 C106.2 C107.2 C111.1 C113.1 C201.1 C202.2 D3.1 FB3.2 FB4.1 H1.48 H1.50 H1.52 JP4.1 JP50.2 L3.2 R1.1 R5.1 R6.1 R10.1 R23.2 R24.2 R25.2 R29.1 R103.2 R110.1 R113.2 RM1.2 U1.C16 U1.D11 U1.G4 U1.J3 U1.L4 U1.P8 U1.U17 U2.1 U2.3 U2.9 U2.14 U2.27 U2.43 U2.49 U3.12 U3.37 U8.13 U8.41 U9.3V3 | length 6834.7
  Top Layer w12: C18.2@121.24,2284.46 v2(207,2284.46) U2.43@261.5,2284.46 ; C17.2@124,2095.48 v2(207,2095.48) U2.49@261.5,2095.48 ; v2(201,1843) 230.37,1843 RM1.2@295,1778.37 ; v2(637,2189.97) C19.2@797.69,2189.97 ; U2.1@693,1938 v2(750,1938) C23.2@787.41,1938 ; U2.3@693,2000.99 764.99,2000.99 797.69,2033.69 C20.2@797.69,2062.99 ; U2.14@693,2347.45 v2(743,2347.45) C22.2@797.69,2347.45 ; U2.27@693,2756.9 v2(743,2756.9) C21.2@787.41,2756.9 ; R113.2@810,479.63 810,453 v2(845,418) ; D3.1@1197.46,120 1315,120 v1(1345,150) ; v2(1530.28,1815.75) U1.J3@1546.02,1800 ; v2(1561.77,1721.26) U1.L4@1577.52,1737.01 U1.L4@1577.52,1736.52 ; U1.G4@1577.52,1862.99 v2(1593.27,1847.24) ; U8.13@1646.5,2647.53 v1(1646.5,2724) ; U8.41@1678,3088.47 1678,3162.69 C202.2@1705.31,3190 1705.31,3170.69 v2(1730,3146) v2@1730,3147.59 ; U1.P8@1703.5,1642.52 v1(1719.25,1626.77) ; U1.D11@1797.99,1957.48 v2(1813.74,1973.23) ; U1.C16@1955.47,1988.98 v1(1971.22,2004.72) ; U1.U17@1986.97,1548.03 v2(2001.5,1533.5) ; v2(2136,2804.69) C25.2@2190,2804.69 2215.84,2830.54 U3.37@2284.09,2830.54 ; U9.3V3@2879.83,863.41 v2(2954.59,863.41) ; U3.12@3040,2830.54 3201.54,2830.54 ; v2(3046,2578) 3104.37,2578 R29.1@3137,2610.63 ; v2(3062.37,3149.37) R1.1@3141,3149.37 ; v2(3202,2808) C24.1@3202,2871.69
  Bottom Layer w12: FB3.2@334,1372.37 334,1493.57 C113.1@393.43,1553 ; C113.1@393.43,1518.86 C113.1@393.43,1553 ; v1(492,1553) C113.1@393.43,1553 ; v2(585,2406) 624.63,2406 R5.1@625,2405.63 ; v2(845,418) 1244.43,418 C111.1@1322.43,340 ; v2(1164,1466) FB4.1@1256.63,1466 ; R110.1@1257.37,199 1322.43,264.05 C111.1@1322.43,340 ; v1(1345,150) 1535,340 ; C7.2@1494.59,1816 1530.02,1816 v2(1530.28,1815.75) ; v2(1561.77,1721.26) 1592.67,1721.26 C4.2@1593.41,1722 ; v2(1593.27,1847.24) 1593.27,1888.86 C8.2@1593.41,1889 ; v1(1646.5,2724) 1646.5,2667.8 C201.1@1647,2667.31 ; v1(1719.25,1626.77) 1719.25,1660.84 C6.2@1719.41,1661 ; v2(1813.74,1973.23) 1813.74,2008.15 C9.2@1814,2008.41 ; v1(1971.22,2004.72) C1.2@1971.22,2039.41 ; C5.2@2001,1497.59 2001.5,1498.09 v2(2001.5,1533.5) ; L3.2@2058.8,984 L3.2@2064,978.8 ; L3.2@2064,1014.8 L3.2@2064,978.8 ; C106.2@2242.09,879.37 R103.2@2064,879.37 L3.2@2064,978.8 ; C106.2@2244,881.28 2340.12,881.28 C107.2@2364,857.4 2388.2,857.4 2430.6,815 2430.6,409.6 2361,340 1535,340 ; R24.2@2725.63,1670 2725.63,1636.37 2748.41,1613.59 v2(2808.59,1613.59) ; R25.2@2886,1847.59 R25.2@2886,1861.37 v2(2886,1904) ; R6.1@2944.63,1247 3094.63,1397 JP4.1@3096,1397 3170.37,1397 R23.2@3281,1507.63 ; R10.1@3154,2699.37 3202,2747.37 v2(3202,2808) ; C111.1@1322.43,340 1535,340
  other v2: 750,2000.99
3V3_CTRL: R110.2 R111.2 U7.4 U7.5 U7.6 U7.9 | length 1186.4
  Top Layer w12: U7.4@1625.61,606.81 U7.5@1651.2,606.81 ; v1(1651.2,534) U7.5@1651.2,606.81 ; U7.6@1676.8,606.81 U7.5@1651.2,606.81 ; v1(1753.57,553) U7.9@1753.57,606.81
  MidLayer1 w12: v1(1072,266) 1102,266 1370,534 v1(1651.2,534) 1735.87,534 1753.57,551.7 v1(1753.57,553)
  Bottom Layer w12: R111.2@1033.37,202 1054,202 1072,220 ; v1(1072,266) 1072,220 ; R110.2@1178.63,199 1093,199 1072,220
5V: C108.2 C109.1 D1.1 H1.32 H2.25 H2.26 R105.2 U7.16 | length 7900.3
  Top Layer w12: D1.1@1197.46,320 v2(1245,320) ; C109.1@1524,438.43 1623.43,339 2356,339 2427.5,410.5 2427.5,780.5 2662,1015 2815,1015 3179.75,1379.75 3179.75,2369.25 3262,2451.49 3262,3325 3039,3548 2262,3548 2262,3477 2237,3452 2067,3452 H1.32@2015,3400 1964,3451 1764,3451 H2.25@1715,3500 H2.26@1715,3600 ; C109.1@1526,440.43 v1(1526,509) ; U7.16@1651.2,833.19 v1(1651.2,887) ; v1(1830.41,825.59) C108.2@2075.81,825.59
  MidLayer1 w12: v2(1245,320) 1434,509 v1(1526,509) 1822.41,509 1830.41,517 v1(1830.41,825.59) 1830.41,918 ; v1(1651.2,887) 1651.2,918 1829.41,918
A0: U1.A2 U2.15 | length 1038.4
  Top Layer w7: U2.15@693,2378.95 750.95,2378.95 778,2406 1024.95,2406 1216.18,2214.76 1452.48,2214.76 1514.53,2152.72 U1.A2@1514.53,2051.97
A1: U1.A3 U8.47 | length 1464.3
  Top Layer w7: U8.47@1489.02,3088.47 v1(1489.02,3014) 1489.02,2870.02 1400,2781 1256,2781 1192,2717 1192,2403 1325,2270 1451,2270 1546.02,2174.98 U1.A3@1546.02,2051.97
A2: U1.C4 U2.23 U8.3 | length 1494.1
  Top Layer w7: U2.23@693,2630.91 v1(743,2630.91) ; U8.3@1331.54,2647.53 1331.54,2526.54 v1(1265,2460) 1404.58,2320.42 1465.58,2320.42 v1(1536,2250) ; v3(1561.77,2004.72) U1.C4@1577.52,1988.98
  MidLayer1 w7: v1(1536,2250) 1561.77,2224.23 v3(1561.77,2004.72)
  Bottom Layer w7: v1(743,2630.91) 1036.09,2630.91 1207,2460 v1(1265,2460)
A3: U1.B5 U2.24 U8.4 | length 1486.5
  Top Layer w7: U2.24@693,2662.41 v1(743,2662.41) ; U8.4@1363.04,2647.53 1363.04,2592 1375,2580.04 v1(1375,2480.63) 1593.63,2262 1593.63,2035.86 U1.B5@1609.02,2020.47
  Bottom Layer w7: v1(743,2662.41) 1039.59,2662.41 1222,2480 v1@1375,2480
A4: U1.C5 U2.25 U8.5 | length 1575.5
  Top Layer w7: U2.25@693,2693.91 v1(743,2693.91) ; U8.5@1394.54,2634 1394.54,2494.46 v1(1407,2482) ; v1(1593.27,2004.72) U1.C5@1609.02,1988.98
  Bottom Layer w7: v1(743,2693.91) 1041.09,2693.91 1235,2500 1389,2500 v1(1407,2482) 1407,2481 1465,2423 1533,2423 1546,2410 1546,2284.27 1593.27,2237 1593.27,2195 v1(1593.27,2004.72)
A5: U1.D5 U2.26 U8.6 | length 2088.9
  Top Layer w7: U2.26@693,2725.4 v1(743,2725.4) ; U8.6@1426.03,2647.53 v1(1426.03,2724) ; v1(1593.27,1941.73) U1.D5@1609.02,1957.48
  MidLayer1 w7: v1(743,2725.4) 757.6,2725.4 906,2577 ; v1(906,2472) 906,2577 ; v1(1426.03,2724) 1426.03,2747.97 1425.03,2748.97 983,2748.97 906,2671.97 906,2577
  Bottom Layer w7: v1(906,2472) 906,2418 1005.85,2318.15 1098,2318.15 1322,2094.15 1442.35,2094.15 1593.27,1943.24 v1(1593.27,1941.73)
A6: U1.A4 U2.29 U8.7 | length 2091.7
  Top Layer w7: v1(207,2725.4) U2.29@261.5,2725.4 ; v1(1365,2420) 1441.24,2343.76 1477.76,2343.76 1577.52,2244 U1.A4@1577.52,2051.97 ; v1(1440,2479) 1440,2554 1457.53,2571.53 U8.7@1457.53,2647.53
  MidLayer1 w7: v1(1365,2420) 1381,2420 v1(1440,2479)
  Bottom Layer w7: v1(207,2725.4) 327.4,2605 699,2605 724,2580 1008,2580 1168,2420 v1(1365,2420)
A7: U1.B6 U2.30 U8.20 | length 2556.9
  Top Layer w7: v1(207,2693.91) U2.30@261.5,2693.91 ; v1(1546.48,2438.48) 1525,2417 v1(1525,2400) 1625.12,2299.88 1625.12,2035.86 U1.B6@1640.51,2020.47 ; U8.20@1866.98,2647.53 v1(1866.98,2724)
  Bottom Layer w7: v1(207,2693.91) 315.91,2585 680,2585 705,2560 979,2560 1139,2400 v1(1525,2400) ; v1(1546.48,2438.48) 1611,2503 1770,2503 1866.98,2599.98 v1(1866.98,2724)
A8: U1.A5 U2.31 U8.21 | length 2547
  Top Layer w7: v1(207,2662.41) U2.31@261.5,2662.41 ; v1(1515,2380) 1609.02,2285.98 U1.A5@1609.02,2051.97 ; U8.21@1898.47,2647.53 v1(1898.47,2724)
  MidLayer1 w7: v1(1515,2380) v1(1577,2380)
  Bottom Layer w7: v1(207,2662.41) 304.41,2565 661.02,2565 686.02,2540 958.02,2540 1118.02,2380 v1(1515,2380) ; v1(1577,2380) 1577,2425 1643,2491 1788,2491 1898.47,2601.47 v1(1898.47,2724)
A9: U1.C6 U2.32 U8.22 | length 2820
  Top Layer w7: v1(207,2630.91) U2.32@261.5,2630.91 ; v1(1624.76,1973.23) U1.C6@1640.51,1988.98 ; U8.22@1929.97,2647.53 v1(1929.97,2724)
  Bottom Layer w7: v1(207,2630.91) 292.91,2545 643,2545 668,2520 946.3,2520 1321,2145.3 1417.7,2145.3 1589.77,1973.23 v1(1624.76,1973.23) 1624.76,2210.25 1608,2227.01 1608,2427 1653,2472 1799,2472 1929.97,2602.97 v1(1929.97,2724)
A10: U1.D7 U2.33 U8.23 | length 2656
  Top Layer w7: v1(207,2599.42) U2.33@261.5,2599.42 ; v1(1656.26,1973.23) U1.D7@1672.01,1957.48 ; U8.23@1961.46,2647.53 v1(1961.46,2724)
  MidLayer1 w7: v1(207,2599.42) 364.42,2442 611,2442 664,2389 937,2389 984,2342 v1(1656.26,2342)
  Bottom Layer w7: v1(1656.26,1973.23) v1(1656.26,2342) 1657.01,2342.75 1657.01,2396.01 1696,2435 1815,2435 1961.46,2581.46 v1(1961.46,2724)
A11: U1.A6 U2.34 U8.24 | length 2450.9
  Top Layer w7: v1(207,2567.92) U2.34@261.5,2567.92 ; U1.A6@1640.51,2051.97 1640.51,2315 v1(1634.51,2321) 1634.51,2359 v1(1640.51,2365) ; v1(1669.5,2451.5) 1698.5,2480.5 1861.5,2480.5 1890.51,2509.51 1932.51,2509.51 1992.96,2569.96 U8.24@1992.96,2647.53
  MidLayer1 w7: v1(207,2567.92) 402.92,2372 849,2372 900,2321 v1(1634.51,2321)
  Bottom Layer w7: v1(1640.51,2365) 1640.51,2422.51 v1(1669.5,2451.5)
A12: U1.B7 U8.31 | length 1261.9
  Top Layer w7: U1.B7@1672.01,2020.47 1655.9,2036.58 1655.9,2312.9 1673,2330 v3(1673,2386) ; v1(1992.96,3014) U8.31@1992.96,3088.47
  MidLayer1 w7: v3(1673,2386) 1673,2427 1782,2536 1816,2536 1981.52,2701.52 2003.48,2701.52 v1@2011.46,2709.5 ; v1(1992.96,3014) 2011.46,2995.5 v1(2011.46,2889)
  Bottom Layer w7: v1(2011.46,2710) v1(2011.46,2889)
A13: U1.A7 U2.35 U8.32 | length 2881.3
  Top Layer w7: v1(207,2536.43) U2.35@261.5,2536.43 ; U1.A7@1672.01,2051.97 1687,2066.96 v1(1687,2177) ; v1(1961.46,3014) U8.32@1961.46,3088.47
  MidLayer1 w7: v1(207,2536.43) 423.43,2320 864,2320 883,2301 1573,2301 1687,2187 v1(1687,2177)
  MidLayer2 w7: v1(1687,2177) 1687,2383 1644,2426 1644,2645 1692,2693 1692,2744.54 v1(1961.46,3014)
A14: U1.C7 U2.36 U8.33 | length 3232.2
  Top Layer w7: v1(207,2504.93) U2.36@261.5,2504.93 ; v3(1656.26,2004.72) U1.C7@1672.01,1988.98 ; v1(1929.97,3014) U8.33@1929.97,3088.47
  MidLayer1 w7: v1(207,2504.93) 407.93,2304 847,2304 870,2281 v1(1040,2281) 1562.26,2281 1656.26,2187 v3(1656.26,2004.72)
  MidLayer2 w7: v1(1040,2281) 1040,2493 1364,2817 1732.97,2817 v1(1929.97,3014)
A15: U1.B8 U8.34 | length 1328.2
  Top Layer w7: U1.B8@1703.5,2020.47 v1(1719.25,2004.72) ; v1(1898.47,3014) U8.34@1898.47,3088.47 ; v1(1900,2313) v1(1900,2485)
  Bottom Layer w7: v1(1719.25,2004.72) 1719.25,2109.25 1774,2164 1774,2187 v1(1900,2313) ; v1(1900,2485) 2034,2619 2034,2931 1981.47,2931 v1(1898.47,3014) v1@1903.33,3014
A16: U1.A8 U2.20 U8.35 | length 2628
  Top Layer w7: U2.20@693,2536.43 1082.57,2536.43 v3(1118,2501) ; v1(1466,2501) 1545,2501 1633.44,2412.56 1678.44,2412.56 1690.75,2400.25 1690.75,2218.75 1712,2197.5 1712,2060.46 U1.A8@1703.5,2051.97 ; v1(1866.98,3014) U8.35@1866.98,3088.47
  MidLayer1 w7: v3(1118,2501) v1(1466,2501)
  Bottom Layer w7: v1(1466,2501) 1372,2595 1332,2595 1276,2651 1276,2747 1752,2747 1866.98,2861.98 v1(1866.98,3014)
A17: U1.C8 U2.21 U8.50 | length 2189.3
  Top Layer w7: U2.21@693,2567.92 743,2567.92 1147.92,2567.92 ; v3(1149,2529.88) 1149,2734 1230,2815 1366,2815 1394.53,2843.53 v1(1394.53,3014) U8.50@1394.54,3088.47 ; v1(1687.76,2004.72) U1.C8@1703.5,1988.98
  MidLayer1 w7: v3(1149,2529.88) 1502.88,2529.88 1707.76,2325 1707.76,2102 1687.76,2082 v1(1687.76,2004.72)
A18: U1.A9 U8.51 | length 2095.5
  Top Layer w7: v1(1363.04,3014) U8.51@1363.04,3088.47 ; v1(1730,2185) 1730,2056.97 U1.A9@1735,2051.97
  MidLayer1 w7: v1(1363.04,3014) 1363.04,2870 1391.04,2842 v1(2094,2842)
  Bottom Layer w7: v1(1730,2185) 1730,2355 2057,2355 2094,2392 v1(2094,2842)
A19: U1.C9 U8.52 | length 1980.2
  Top Layer w7: v1(1331.54,3014) U8.52@1331.54,3088.47 ; U1.C9@1735,1988.98 v1(1750.75,2004.72)
  MidLayer1 w7: v1(1331.54,3014) 1331.54,2870 1379.54,2822 v1(2074,2822) 2074,2729.77 1904.23,2560 1860,2560 1750.75,2450.75 v1(1750.75,2004.72)